# Altium PCB XCKU5P.PcbDoc (part 1 of 4)
Units mil, origin at the board's own origin, x right, y up, seen from the top; angles counter-clockwise.
Board outline 2716.54 x 2559.06 mil, 5 copper layers (Top Layer, SIG1, SIG2, SIG3, Bottom Layer); 206 components, 306 nets, 1544 pads, 186 vias.
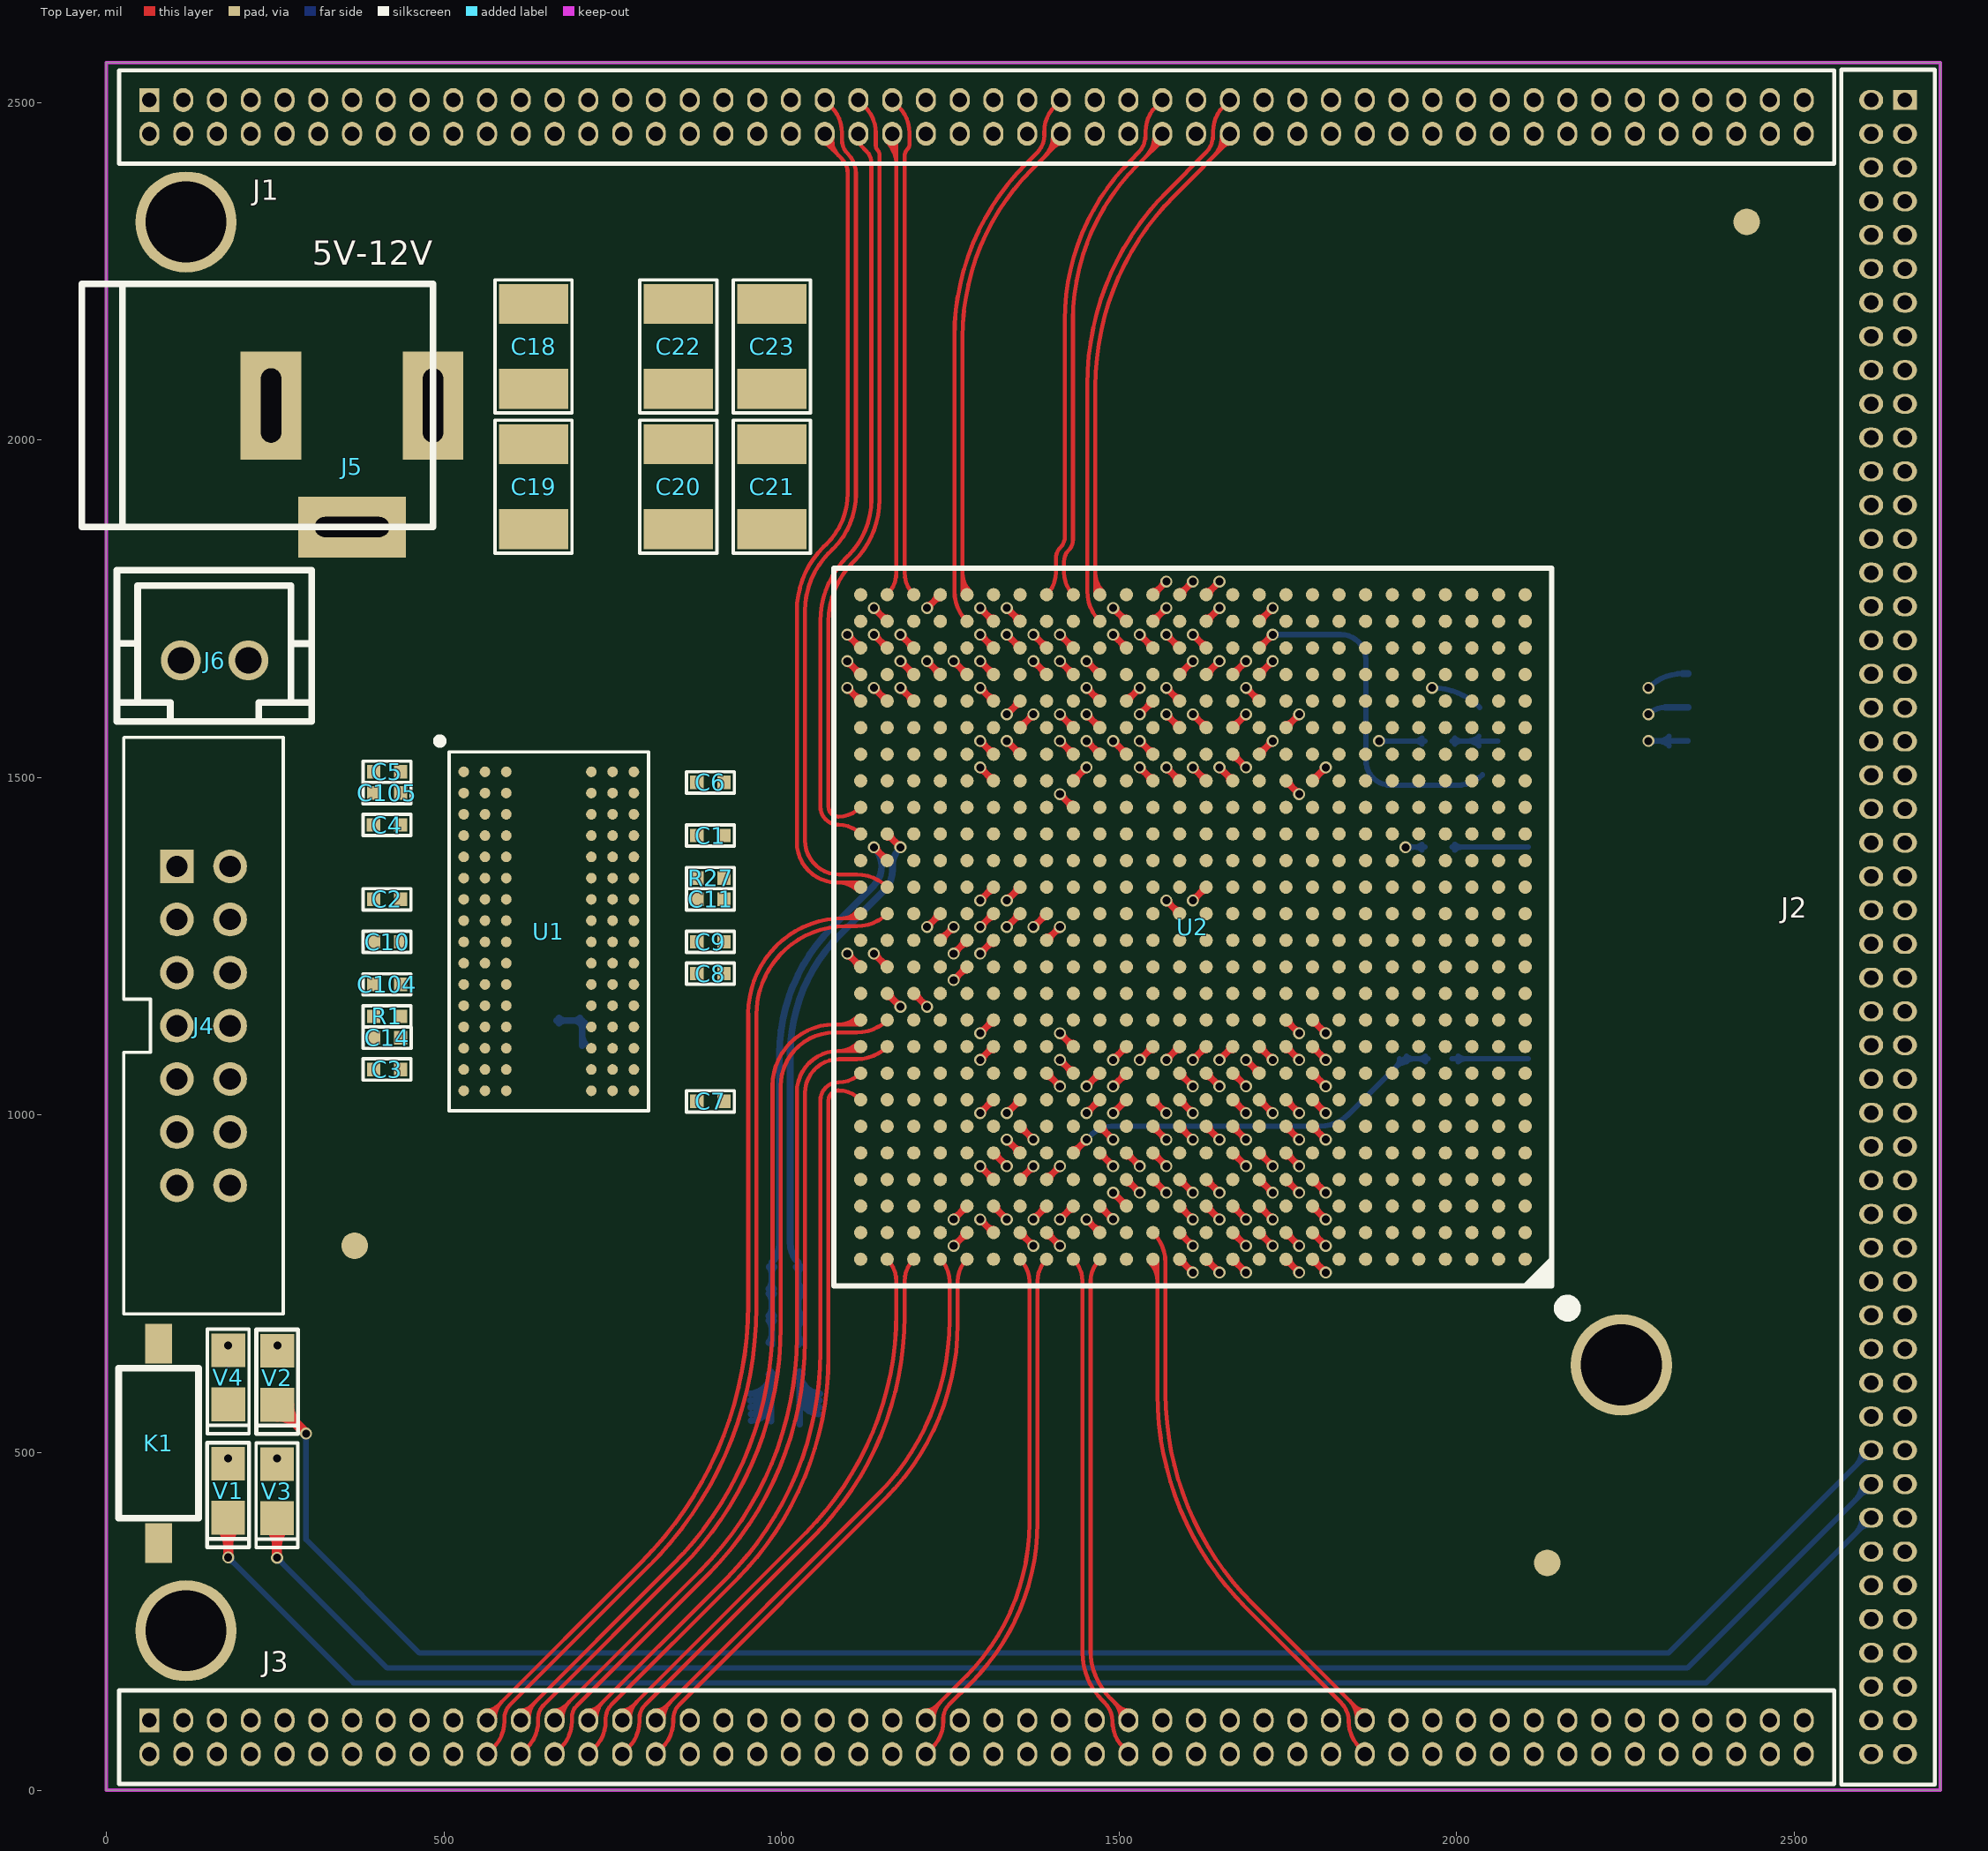
[diagram p0: Top Layer view]
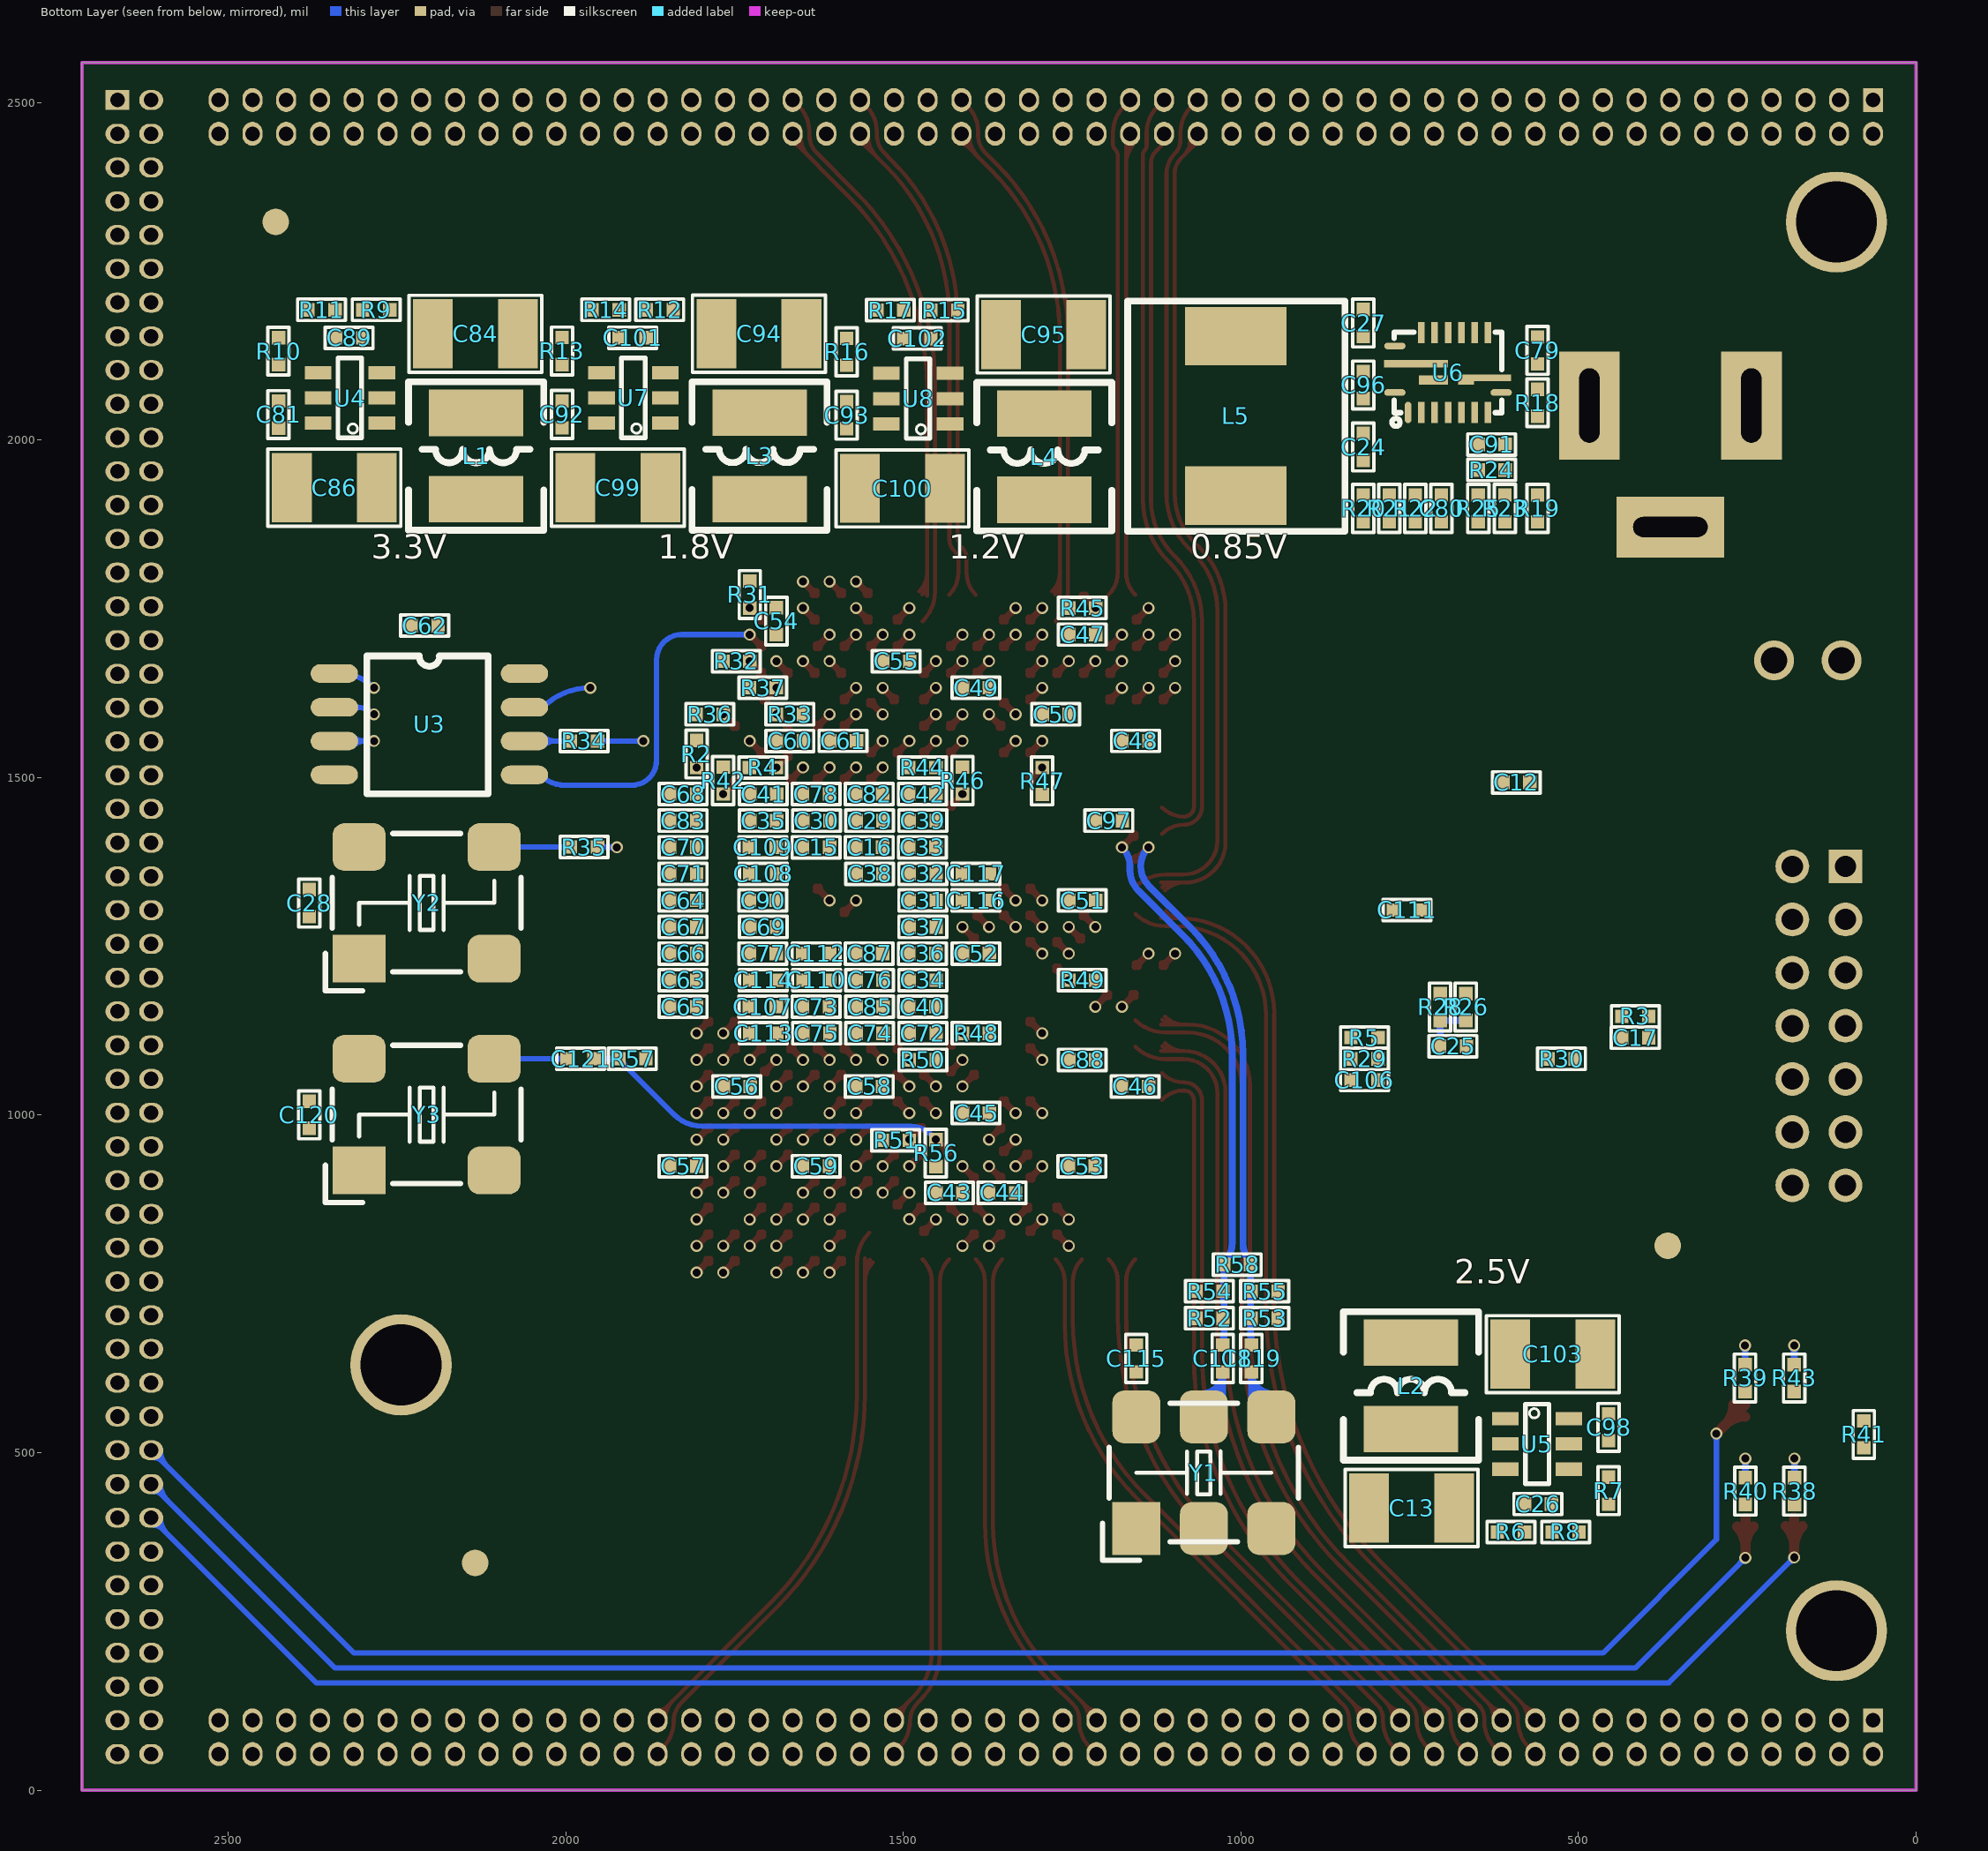
[diagram p1: Bottom Layer view, seen from below]
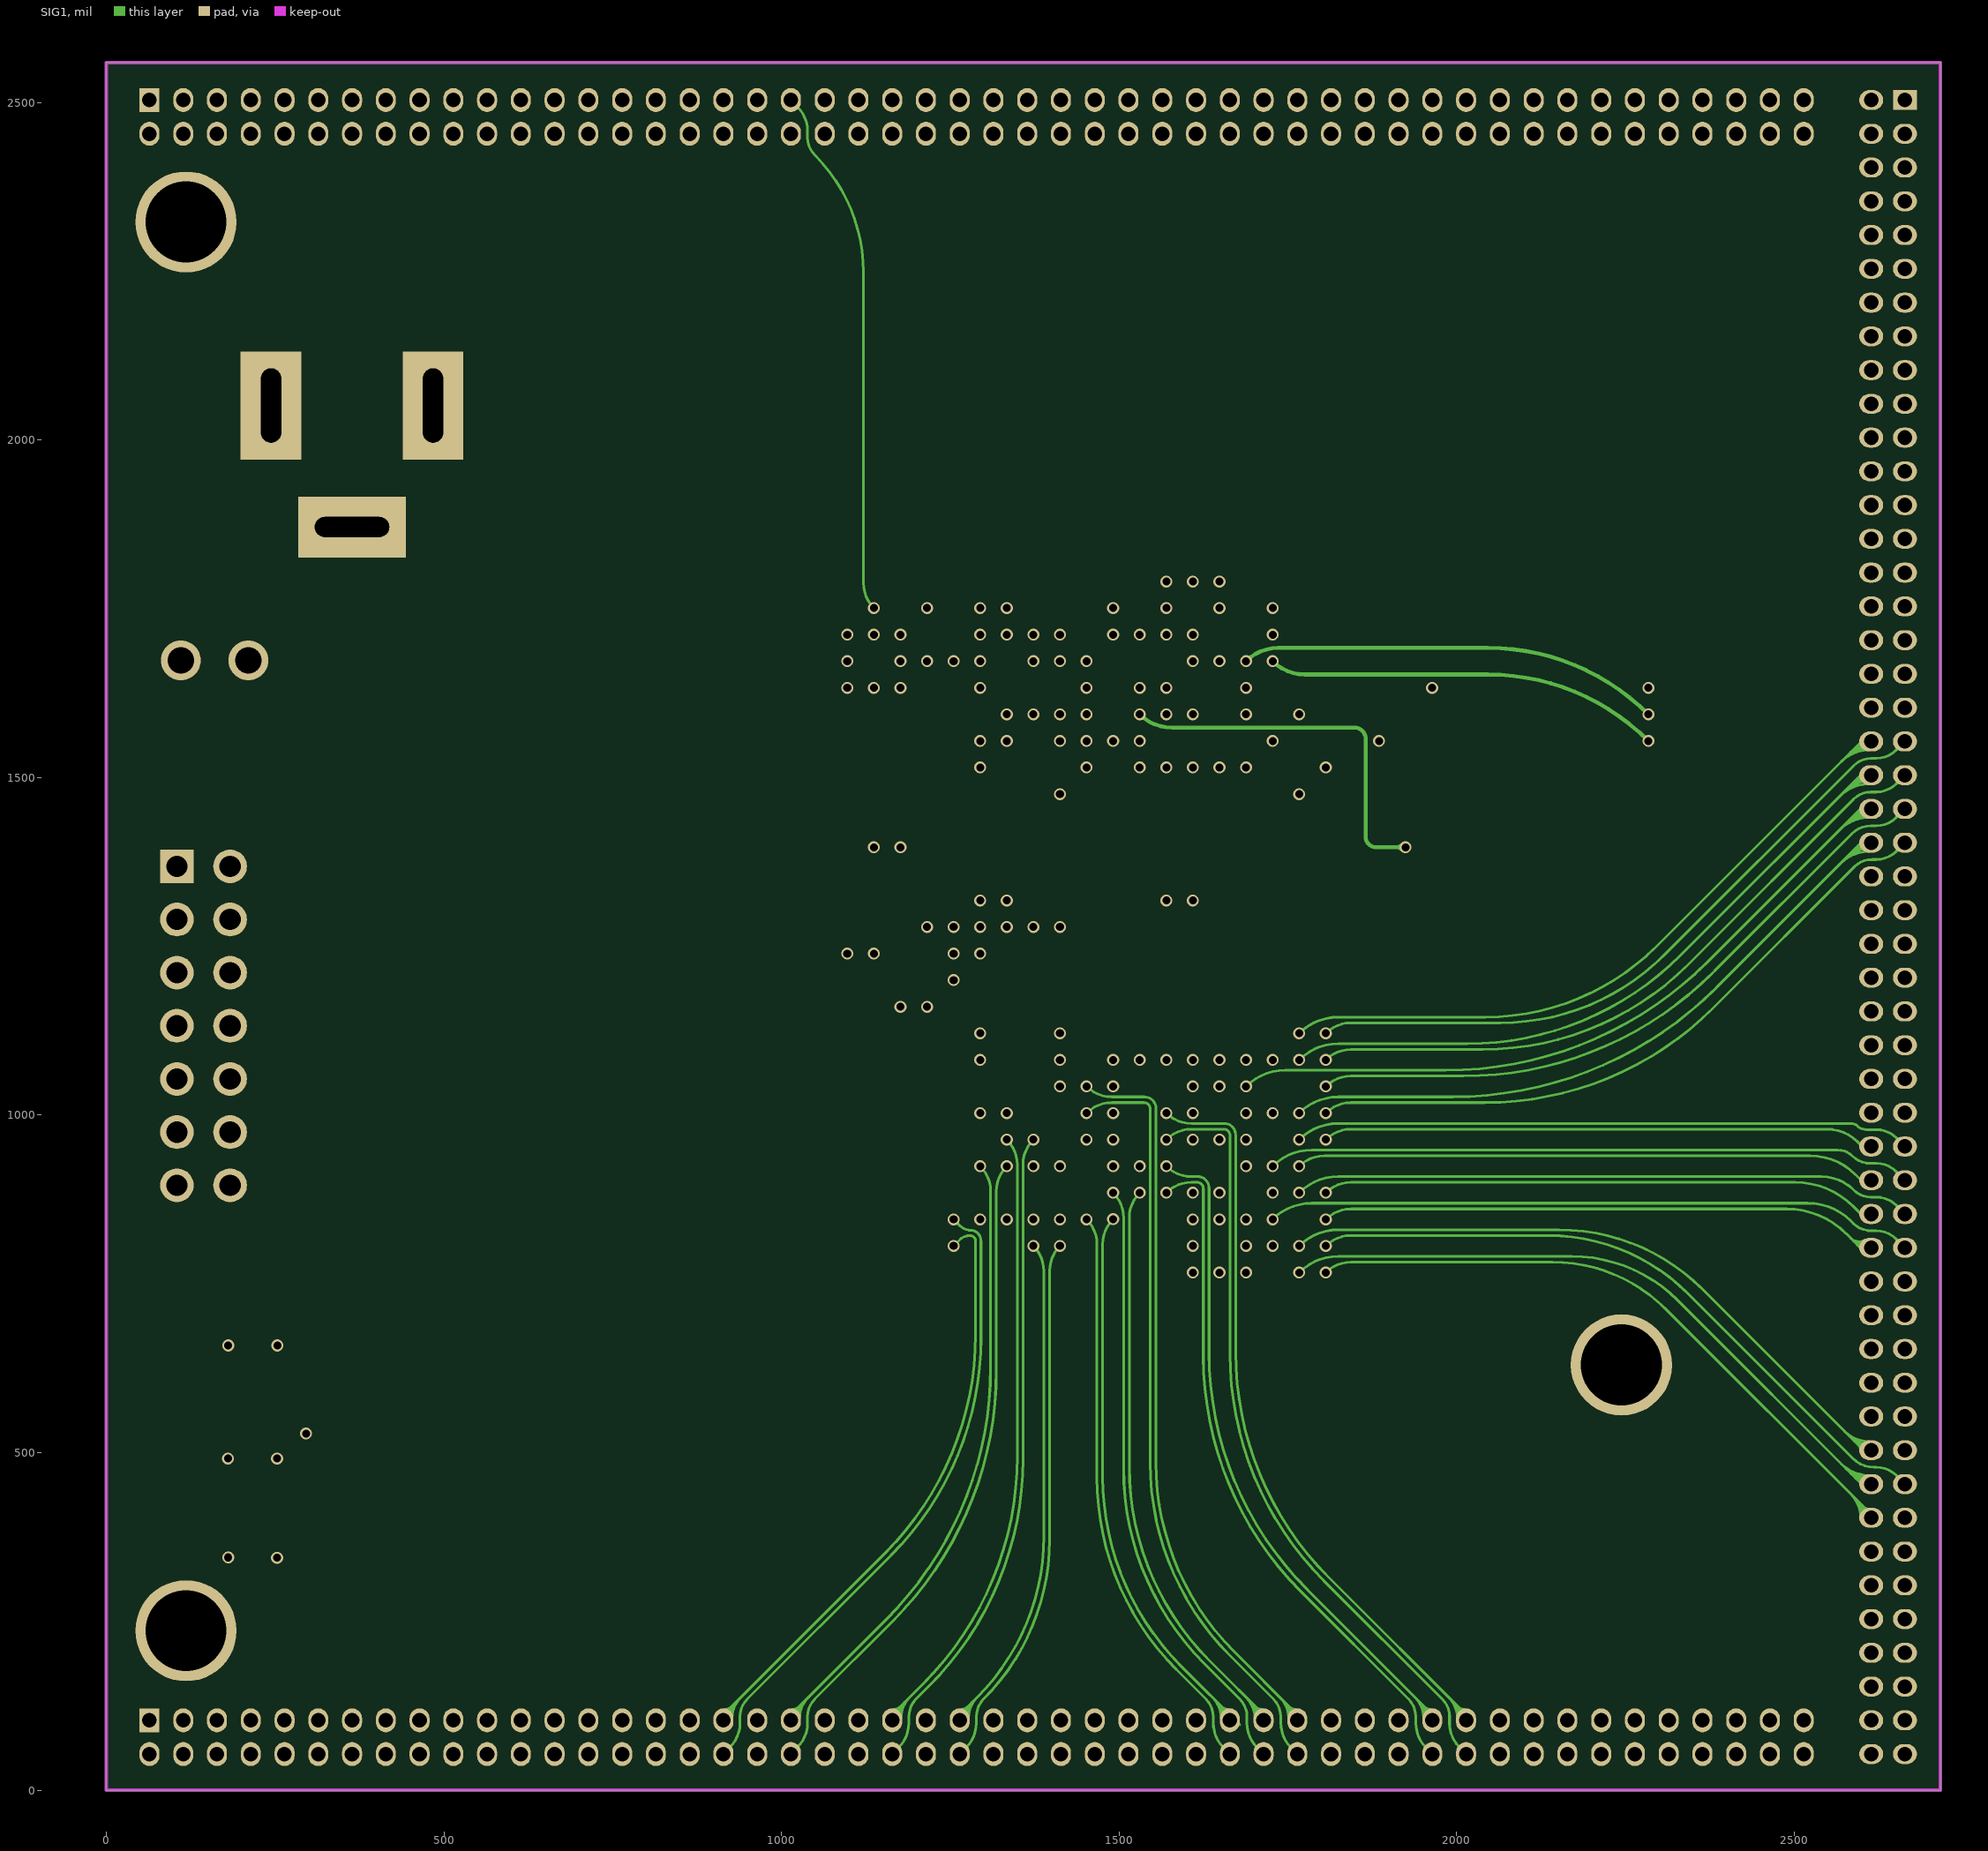
[diagram p2: SIG1]
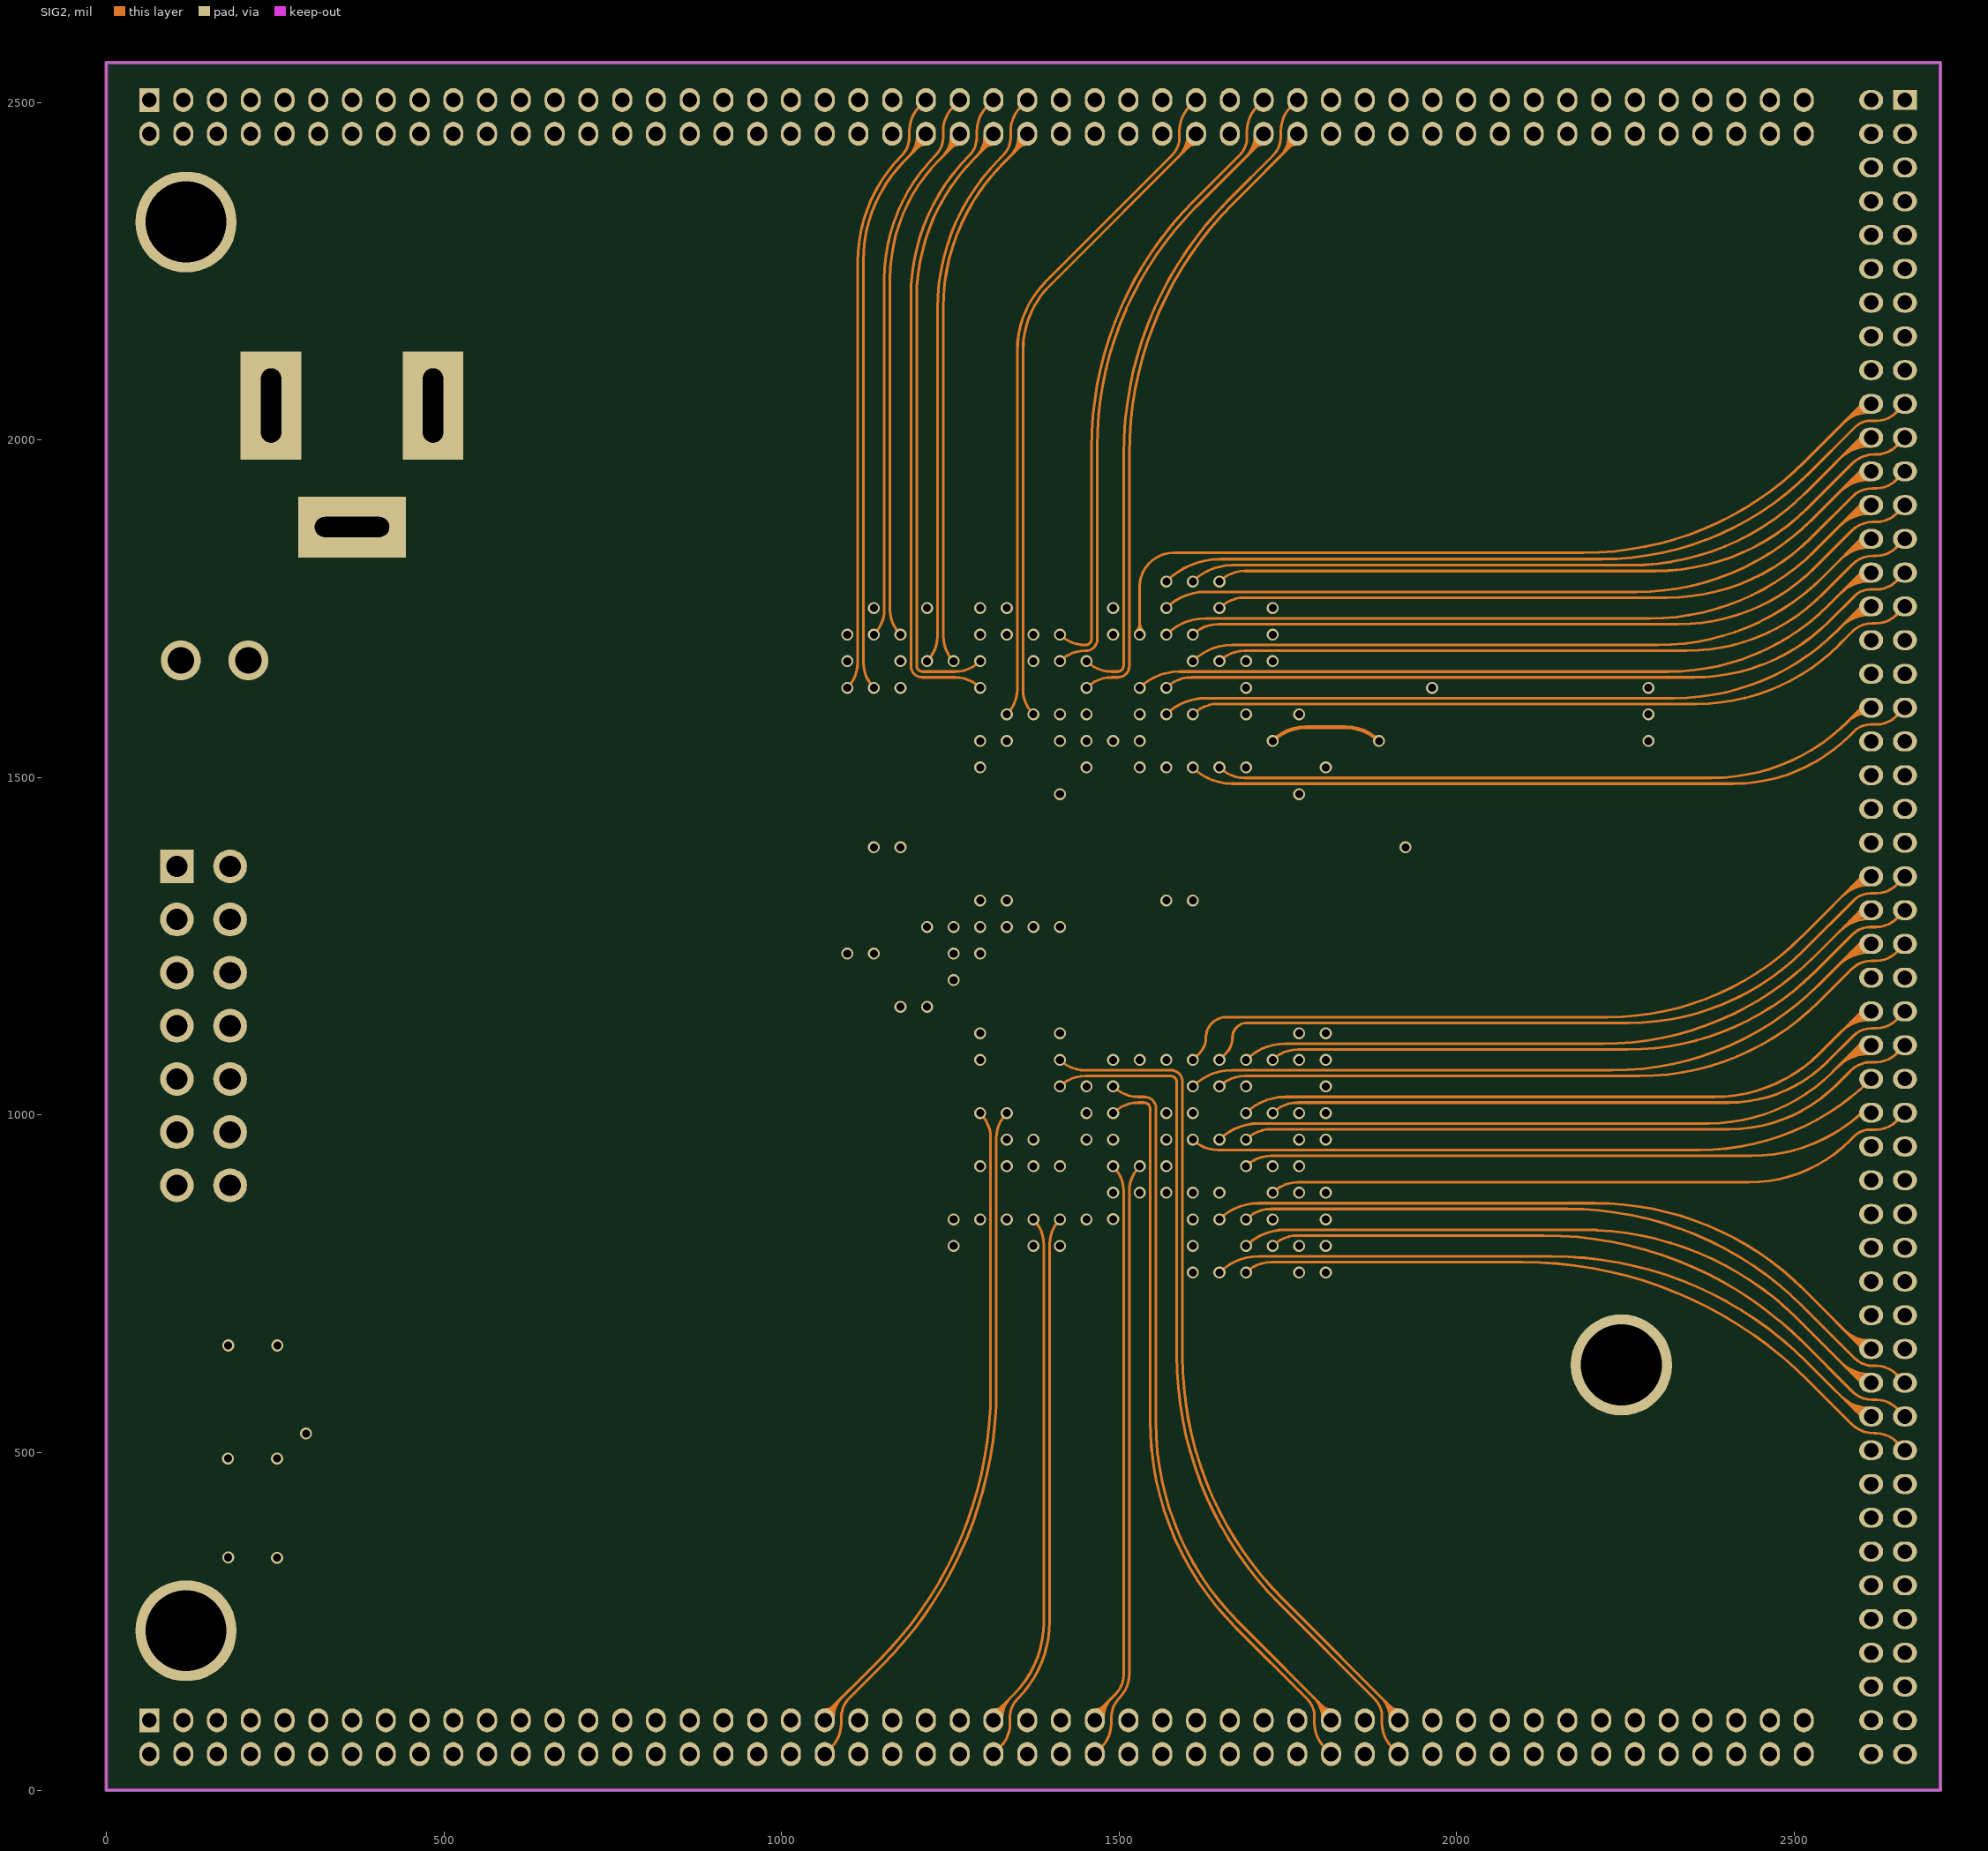
[diagram p3: SIG2]
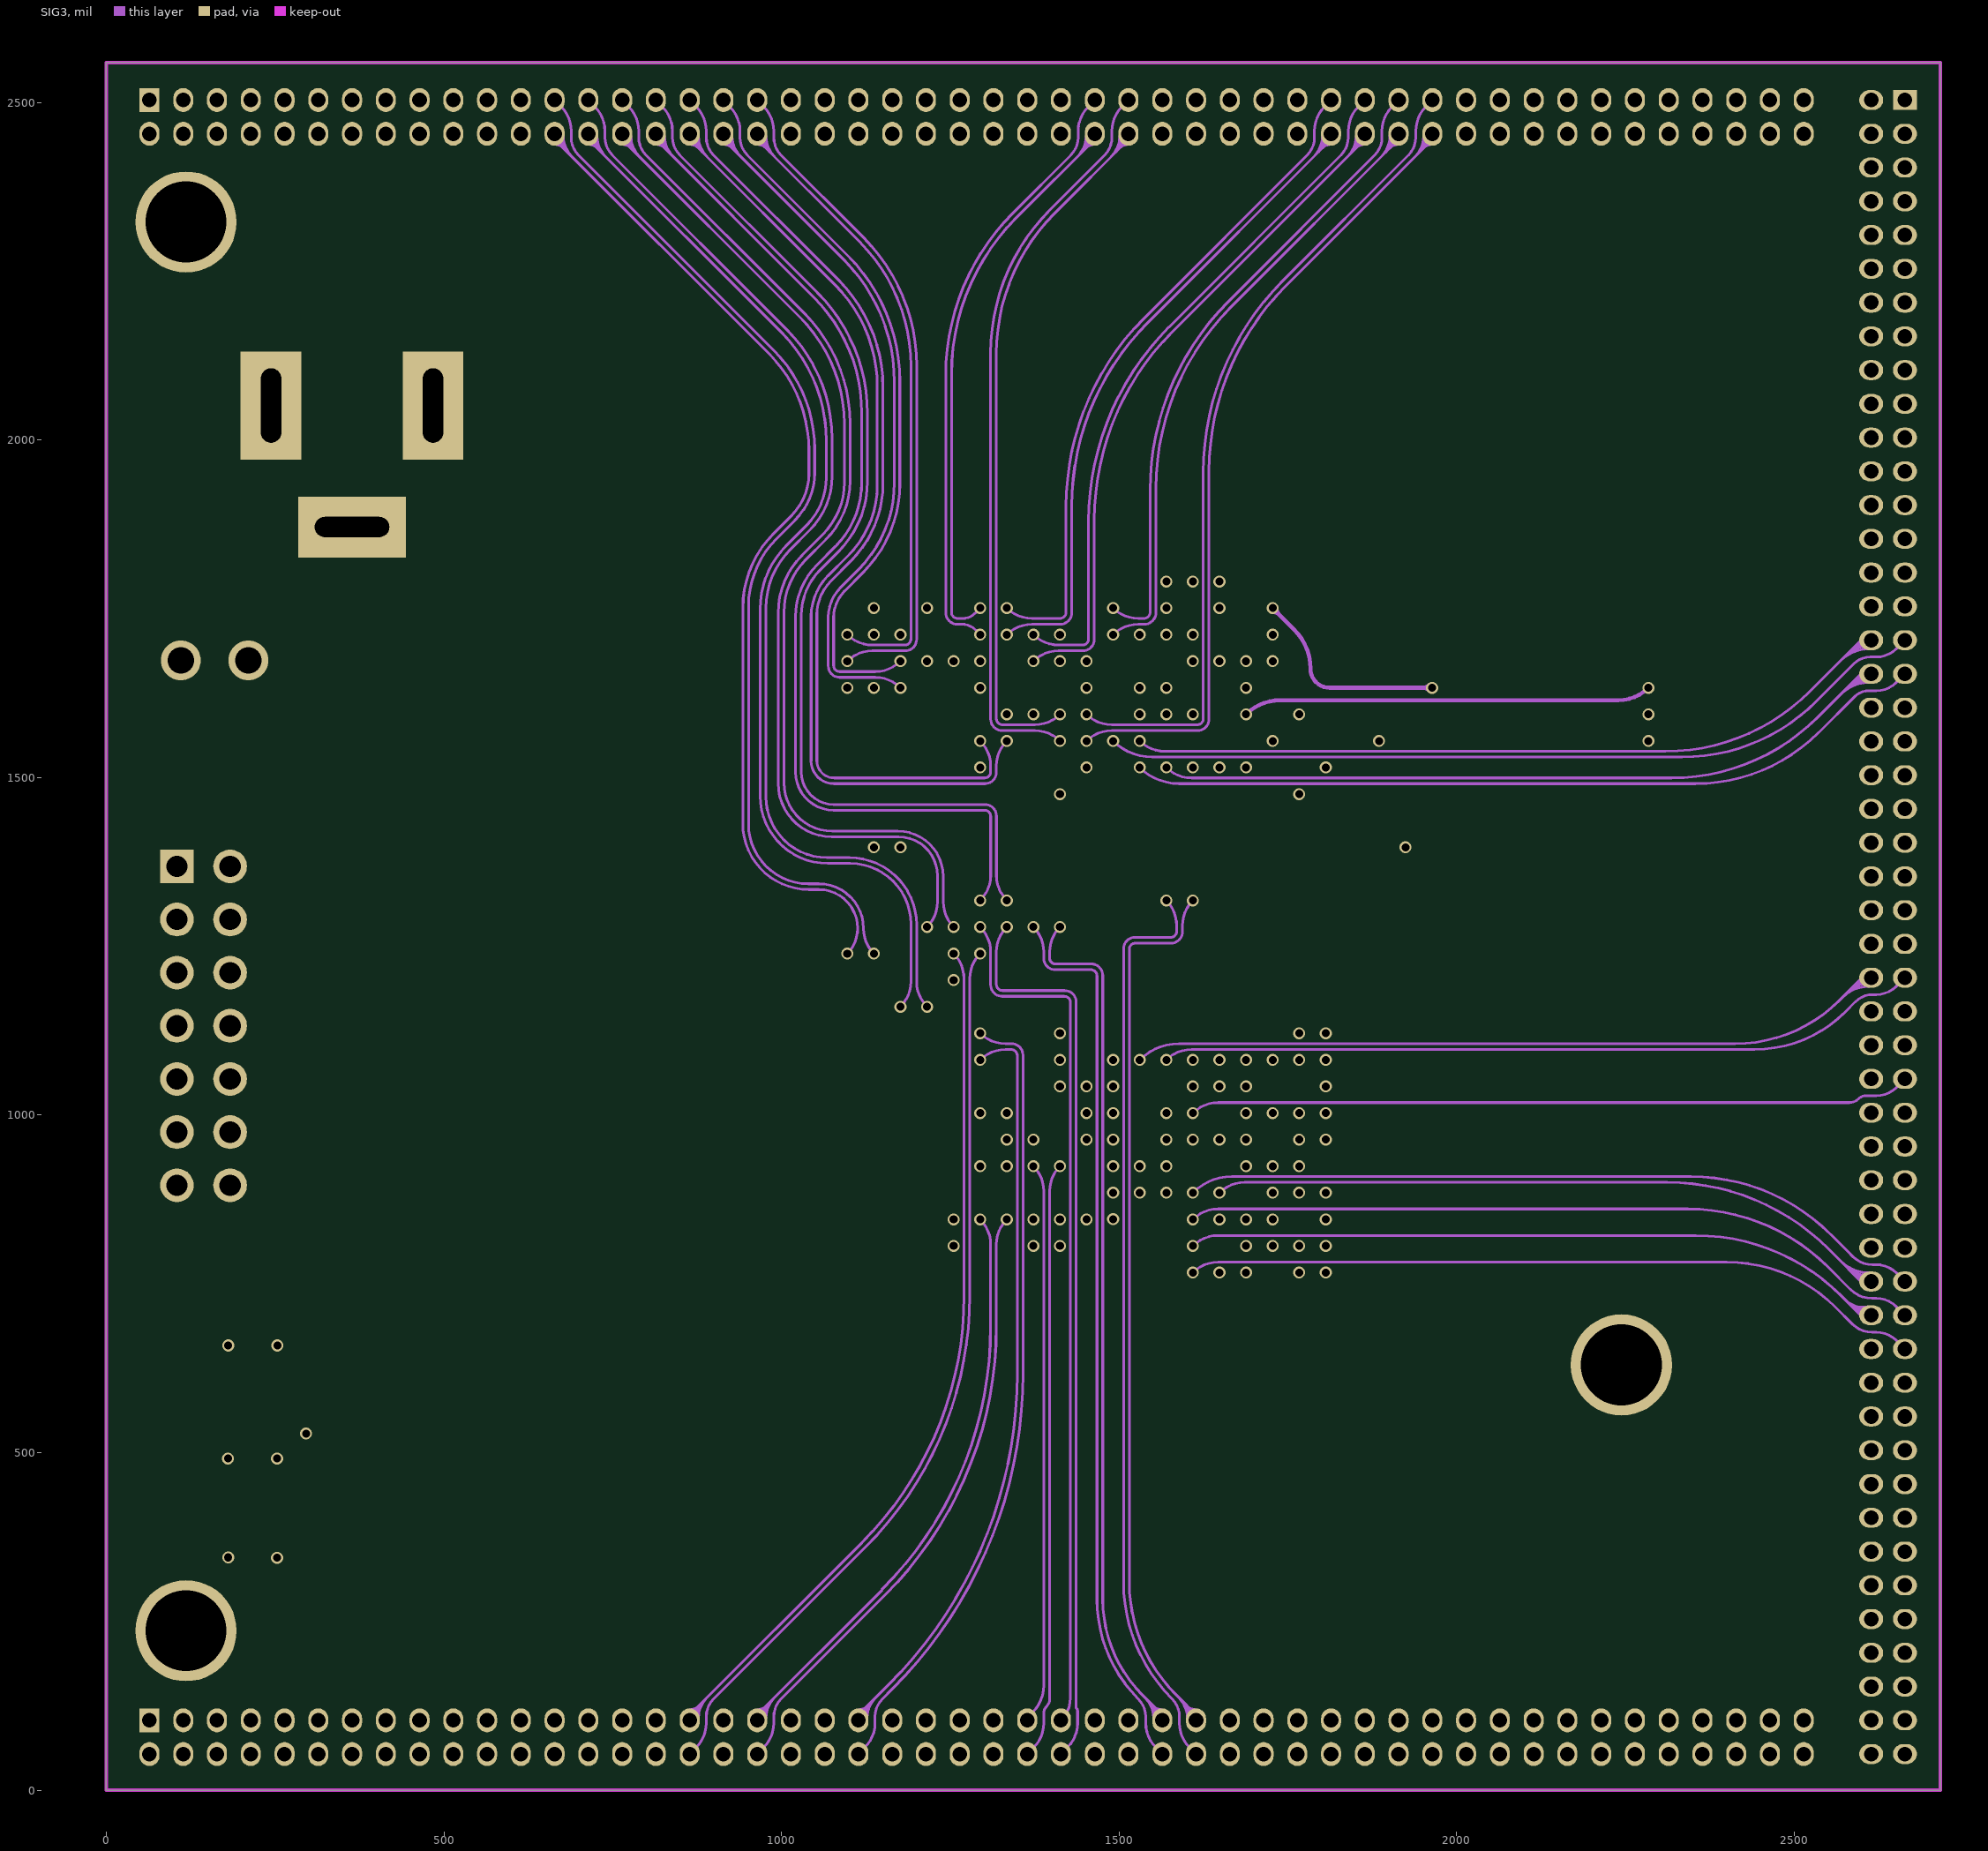
[diagram p4: SIG3]

## Layer stack, top to bottom
Top Layer: signal copper 1.4
Dielectric: core 12.6, FR-4, Dk 4.8
SIG1: signal copper 1.4
Dielectric: prepreg 12.6, FR-4, Dk 4.8
SIG2: signal copper 1.4
Dielectric: core 12.6, FR-4, Dk 4.8
SIG3: signal copper 1.4
Dielectric: prepreg 12.6, FR-4, Dk 4.8
Bottom Layer: signal copper 1.4

## Board outline
0,0 2716.54,0 2716.54,2559.06 0,2559.06

## Design rules (kind name [scope] priority, off if disabled: settings)
Clearance [All] p1: gap=4
DiffPairsRouting [All] p1: maxlimit=10 minlimit=4 mostfreqgap=10 toplayer_maxgap=4 toplayer_prefgap=4 midlayer1_maxgap=4 midlayer1_prefgap=4 midlayer2_maxgap=4 midlayer2_prefgap=4 midlayer3_maxgap=4 midlayer3_prefgap=4 bottomlayer_maxgap=4 bottomlayer_prefgap=4 maxuncoupledlength=500
Height [All] p1: minheight=0 maxheight=10000 prefheight=5000
HoleSize [All] p1: absolutevalues=TRUE maxlimit=1000 minlimit=1 maxpercent=80.000 minpercent=20.000
HoleToHoleClearance [All] p1: gap=0 allowstackedmicrovias=TRUE
MinimumSolderMaskSliver [All] p1: minsoldermaskwidth=0
PlaneClearance PlaneClearance_1 [InNet('VDD12')] p1: clearance=20
PlaneClearance [All] p2: clearance=8
PlaneConnect [All] p1: planeconnectstyle=Direct reliefexpansion=20 reliefentries=4 reliefconductorwidth=10 reliefairgap=10
PolygonConnect [All] p1: connectstyle=Direct reliefconductorwidth=30 reliefentries=4 polygonreliefangle="90 Angle"
RoutingVias [All] p1: holewidth=8 width=16 viastyle="Through Hole" minholewidth=8 minwidth=16 maxholewidth=50 maxwidth=50
SilkToSilkClearance [All] p1: silktosilkclearance=0
SilkscreenOverComponentPads [All] p1: minsilkscreentomaskgap=0
SolderMaskExpansion [All] p1: expansion=2
TestPointUsage [All] p1: valid=0 allowmultiple=FALSE
Testpoint [All] p1: side=15 testpointundercomponent=TRUE minsize=40 maxsize=100 preferedsize=60 minholesize=0 maxholesize=40 preferedholesize=32 testpointgrid=1 style=1021 order=0-112345678
Width [All] p1: maxlimit=60 minlimit=4 preferedwidth=6
15 further rules are at their usual default settings.

## Classes and differential pairs
component class DDR4: C1 C2 C3 C4 C5 C6 C7 C8 C9 C10 C11 C12 C14 C17 C25 C104 C105 C106 C111 R1 R3 R5 R26 R27 R28 R29 R30 U1 U21 V18
component class POWER: C13 C18 C19 C20 C21 C22 C23 C24 C26 C27 C79 C80 C81 C84 C86 C89 C91 C92 C93 C94 C95 C96 C98 C99 C100 C101 C102 C103 D1 F1 J5 J6 J? L1 L2 L3 L4 L5 L? R6 R7 R8 R9 R10 R11 R12 R13 R14 R15 R16 R17 R18 R19 R20 R21 R22 R23 R24 R25 R43 R64 U4 U5 U6 U7 U8 U? V4
component class "FPGA HD BANK": U2
component class "FPGA POWER": C15 C16 C29 C30 C31 C32 C33 C34 C35 C36 C37 C38 C39 C40 C41 C42 C43 C44 C45 C46 C47 C48 C49 C50 C51 C52 C53 C54 C55 C56 C57 C58 C59 C60 C61 C63 C64 C65 C66 C67 C68 C69 C70 C71 C72 C73 C74 C75 C76 C77 C78 C82 C83 C85 C87 C88 C90 C97 C107 C108 C109 C110 C112 C113 C114 C116 C117 C124 C125 C126 C127 C128 C129
component class "FPGA SYSTERM": C28 C62 C115 C118 C119 C120 C121 J1 J2 J3 J4 K1 R2 R4 R31 R32 R33 R34 R35 R36 R37 R38 R39 R40 R41 R42 R52 R53 R54 R55 R56 R57 R58 U3 V1 V2 V3 Y1 Y2 Y3
component class "FPGA HP BANK": R44 R45 R46 R47 R48 R49 R50 R51
differential pair DDR4_DS1: +DDR4_DS1_P -DDR4_DS1_N
differential pair DDR4_DS0: +DDR4_DS0_P -DDR4_DS0_N
differential pair DDR4_CLK: +DDR4_CLK_P -DDR4_CLK_N

## Components (designator, comment, footprint, x,y, rotation, side; value= is the part's Value field where it differs from the comment)
C1 "0.1uF" 0402_c_m 874.84,1414.01 r0 top locked
C2 "0.1uF" 0402_c_m 435.96,1319.52 r180 top locked
C3 "0.1uF" 0402_c_m 435.96,1067.56 r180 top locked
C4 "0.1uF" 0402_c_m 435.92,1429.76 r180 top locked
C5 "0.1uF" 0402_c_m 435.96,1508.5 r180 top locked
C6 "0.1uF" 0402_c_m 874.84,1492.75 r0 top locked
C7 "0.1uF" 0402_c_m 874.84,1020.31 r0 top locked
C8 "0.1uF" 0402_c_m 874.84,1209.54 r0 top locked
C9 "0.1uF" 0402_c_m 874.84,1256.53 r0 top locked
C10 "0.1uF" 0402_c_m 435.96,1256.53 r180 top locked
C11 "0.1uF" 0402_c_m 874.84,1319.52 r0 top locked
C12 "0.1uF" 0402_c_m 612.16,1492.75 r180 bottom locked
C13 "22uF" 1210_C_M 684.2,416.87 r0 bottom locked
C14 "0.1uF" 0402_c_m 396,1114.56 r0 top locked
C15 "0.1uF" 0402_C_M 1609.36,1396.74 r0 bottom locked
C16 "0.1uF" 0402_C_M 1530.62,1396.74 r0 bottom locked
C17 "0.1uF" 0402_c_m 436,1114.56 r180 bottom locked
C18 "22uF" 1210_C_M 633.8,2201.6 r270 top locked
C19 "22uF" 1210_C_M 631.8,1867.79 r90 top locked (schematic designator C79)
C20 "100uF" 1210_C_M 848.25,1993.79 r270 top locked (schematic designator C103)
C21 "100uF" 1210_C_M 986.8,1993.79 r270 top locked (schematic designator C104)
C22 "100uF" 1210_C_M 846.25,2075.6 r90 top locked (schematic designator C105)
C23 "100uF" 1210_C_M 984.8,2075.6 r90 top locked (schematic designator C106)
C24 "0.1uF" 0402_C_M 818.8,1969.71 r90 bottom locked (schematic designator C97)
C25 "0.1uF" 0402_c_m 666,1102 r0 bottom locked
C26 "0.1uF" 0402_C_M 580.19,423.87 r180 bottom locked
C27 "0.1uF" 0402_C_M 818.8,2153.14 r90 bottom locked (schematic designator C98)
C28 "0.1uF" 0402_C_M 2380,1334 r270 bottom locked
C29 "0.1uF" 0402_C_M 1569.99,1436.11 r180 bottom locked
C30 "0.1uF" 0402_C_M 1648.73,1436.11 r180 bottom locked
C31 "0.1uF" 0402_C_M 1451.24,1318 r0 bottom locked
C32 "0.1uF" 0402_C_M 1491.24,1357.37 r180 bottom locked
C33 "0.1uF" 0402_C_M 1451.87,1396.74 r0 bottom locked
C34 "0.1uF" 0402_C_M 1491.24,1199.89 r180 bottom locked
C35 "0.1uF" 0402_C_M 1727.46,1436.12 r180 bottom locked
C36 "0.1uF" 0402_C_M 1451.87,1239.26 r0 bottom locked
C37 "0.1uF" 0402_C_M 1491.24,1278.63 r180 bottom locked
C38 "0.1uF" 0402_C_M 1569.99,1357.37 r180 bottom locked
C39 "0.1uF" 0402_C_M 1491.24,1436.11 r180 bottom locked
C40 "0.1uF" 0402_C_M 1451.87,1160.52 r0 bottom locked
C41 "0.1uF" 0402_C_M 1687.47,1475.48 r0 bottom locked
C42 "0.1uF" 0402_C_M 1451.87,1475.49 r0 bottom locked
C43 "0.1uF" 0402_C_M 1451.87,884.93 r180 bottom locked
C44 "0.1uF" 0402_C_M 1333.76,884.93 r0 bottom locked
C45 "0.1uF" 0402_C_M 1412.5,1003.04 r180 bottom locked
C46 "0.1uF" 0402_C_M 1136.91,1042.41 r0 bottom locked
C47 "0.1uF" 0402_C_M 1255.02,1711.71 r180 bottom locked
C48 "0.1uF" 0402_C_M 1176.28,1554.23 r180 bottom locked
C49 "0.1uF" 0402_C_M 1412.5,1632.97 r180 bottom locked
C50 "0.1uF" 0402_C_M 1294.39,1593.6 r180 bottom locked
C51 "0.1uF" 0402_C_M 1255.02,1318 r180 bottom locked
C52 "0.1uF" 0402_C_M 1412.5,1239.26 r180 bottom locked
C53 "0.1uF" 0402_C_M 1215.65,924.3 r0 bottom locked
C54 "0.1uF" 0402_c_m 1688.1,1711.71 r90 bottom locked
C55 "0.1uF" 0402_C_M 1530.61,1672.34 r180 bottom locked
C56 "0.1uF" 0402_C_M 1766.84,1042.41 r180 bottom locked
C57 "0.1uF" 0402_C_M 1806.21,924.3 r0 bottom locked
C58 "0.1uF" 0402_C_M 1530.61,1042.41 r0 bottom locked
C59 "0.1uF" 0402_C_M 1609.36,924.3 r0 bottom locked
C60 "0.1uF" 0402_C_M 1688.09,1554.22 r180 bottom locked
C61 "0.1uF" 0402_C_M 1609.36,1554.23 r180 bottom locked
C62 "0.1uF" 0402_C_M 2189,1725 r0 bottom locked
C63 "0.1uF" 0402_C_M 1806.21,1199.89 r0 bottom locked
C64 "0.1uF" 0402_C_M 1806.21,1318 r0 bottom locked
C65 "0.1uF" 0402_C_M 1806.21,1160.52 r0 bottom locked
C66 "0.1uF" 0402_C_M 1806.21,1239.26 r0 bottom locked
C67 "0.1uF" 0402_C_M 1806.21,1278.63 r0 bottom locked
C68 "0.1uF" 0402_C_M 1806.21,1475.49 r0 bottom locked
C69 "0.1uF" 0402_C_M 1727.47,1278.63 r180 bottom locked
C70 "0.1uF" 0402_C_M 1806.21,1396.74 r0 bottom locked
C71 "0.1uF" 0402_C_M 1806.21,1357.37 r0 bottom locked
C72 "0.1uF" 0402_C_M 1491.24,1121.15 r180 bottom locked
C73 "0.1uF" 0402_C_M 1609.36,1160.52 r0 bottom locked
C74 "0.1uF" 0402_C_M 1569.99,1121.15 r180 bottom locked
C75 "0.1uF" 0402_C_M 1648.73,1121.15 r180 bottom locked
C76 "0.1uF" 0402_C_M 1569.99,1199.89 r180 bottom locked
C77 "0.1uF" 0402_C_M 1688.1,1239.26 r0 bottom locked
C78 "0.1uF" 0402_C_M 1609.35,1475.49 r0 bottom locked
C79 "0.1uF" 0402_C_M 560.8,2112.6 r90 bottom locked
C80 "0.1uF" 0402_C_M 703.09,1878.6 r90 bottom locked
C81 "0.1uF" 0402_C_M 2425.48,2057.62 r270 bottom locked
C82 "0.1uF" 0402_C_M 1530.61,1475.49 r0 bottom locked
C83 "0.1uF" 0402_C_M 1806.21,1436.11 r0 bottom locked
C84 "22uF" 1210_C_M 2196.8,2158.24 r180 bottom locked
C85 "0.1uF" 0402_C_M 1529.99,1160.52 r0 bottom locked
C86 "100uF" 1210_C_M 2279.8,1928.24 r0 bottom locked
C87 "0.1uF" 0402_C_M 1530.62,1239.26 r0 bottom locked
C88 "0.1uF" 0402_C_M 1255.02,1081.78 r180 bottom locked
C89 "0.1uF" 0402_C_M 2300.81,2151.24 r0 bottom locked
C90 "0.1uF" 0402_C_M 1688.1,1318 r0 bottom locked
C91 "NC" 0402_C_M 648.8,1993.29 r180 bottom locked
C92 "0.1uF" 0402_C_M 2005.58,2057.78 r270 bottom locked
C93 "0.1uF" 0402_C_M 1583.98,2056.63 r270 bottom locked
C94 "22uF" 1210_C_M 1776.9,2158.4 r180 bottom locked
C95 "22uF" 1210_C_M 1355.3,2157.26 r180 bottom locked
C96 "0.1uF" 0402_C_M 818.8,2061.42 r90 bottom locked
C97 "0.1uF" 0402_C_M 1215.65,1436.12 r180 bottom locked
C98 "0.1uF" 0402_C_M 455.52,517.5 r90 bottom locked
C99 "100uF" 1210_C_M 1859.9,1928.4 r0 bottom locked
C100 "100uF" 1210_C_M 1438.3,1927.26 r0 bottom locked
C101 "0.1uF" 0402_C_M 1880.91,2151.4 r0 bottom locked
C102 "0.1uF" 0402_C_M 1459.31,2150.26 r0 bottom locked
C103 "100uF" 1210_C_M 601.2,646.87 r180 bottom locked
C104 "0.1uF" 0402_c_m 435.96,1193.54 r180 top locked
C105 "0.1uF" 0402_c_m 435.96,1477 r180 top locked
C106 "0.1uF" 0402_c_m 797.13,1051.81 r0 bottom locked
C107 "0.1uF" 0402_C_M 1688.1,1160.52 r0 bottom locked
C108 "0.1uF" 0402_C_M 1727.47,1357.37 r180 bottom locked
C109 "0.1uF" 0402_C_M 1688.1,1396.74 r0 bottom locked
C110 "0.1uF" 0402_C_M 1648.73,1199.89 r180 bottom locked
C111 "0.1uF" 0402_c_m 734.14,1303.78 r0 bottom locked
C112 "0.1uF" 0402_C_M 1609.35,1239.26 r0 bottom locked
C113 "0.1uF" 0402_C_M 1727.47,1121.15 r180 bottom locked
C114 "0.1uF" 0402_C_M 1727.47,1199.89 r180 bottom locked
C115 "0.1uF" 0402_C_M 1155,619.5 r90 bottom locked
C116 "0.1uF" 0402_C_M 1412.5,1318 r180 bottom locked
C117 "0.1uF" 0402_C_M 1412.5,1357.37 r180 bottom locked
C118 "0.1uF" 0402_C_M 1026.97,619.5 r90 bottom locked
C119 "0.1uF" 0402_C_M 984.6,619.5 r90 bottom locked
C120 "0.1uF" 0402_C_M 2380,1020.36 r270 bottom locked
C121 "0.1uF" 0402_C_M 1958,1083.36 r0 bottom locked
J1 "DIP100-1.27" CON100_1.27 64.02,2503.5 r270 top locked
J2 "DIP100-1.27" CON100_1.27 2664.02,2503.5 r180 top locked
J3 "DIP100-1.27" CON100_1.27 64.02,103.5 r270 top locked
J4 "DC3-14-2.0" DC3-14-2.0 104.67,1368.44 r0 top locked
J5 "DC5.5_2.1" DC5.5 484.02,2051 r180 top locked
J6 "SIP2" 2.54mm_2p 110.4,1673.5 r0 top locked
K1 "KEY" KEY2 77.54,661.48 r270 top locked
L1 "SWPA5040S3R3MT" CD42 2132.81,1976.22 r270 bottom locked
L2 "SWPA5040S3R3MT" CD42 748.19,598.9 r90 bottom locked
L3 "SWPA5040S3R3MT" CD42 1712.91,1976.38 r270 bottom locked
L4 "SWPA5040S3R3MT" CD42 1291.31,1975.23 r270 bottom locked
L5 "0630CDMCCDS-R22MC" SWPA8050S 1007.8,2035.6 r270 bottom locked
R1 "240" 0402_r_m 435.96,1146.3 r180 top locked
R2 "10k" 0402_R_M 1806.21,1514.86 r90 bottom locked
R3 "240" 0402_r_m 395.96,1146.3 r0 bottom locked
R4 "10k" 0402_R_M 1688.1,1514.85 r0 bottom locked
R5 "240" 0402_R_M 797.13,1114.8 r0 bottom locked
R6 "3.3k" 0402_R_M 580.19,382.36 r0 bottom locked
R7 "22k" 0402_R_M 455.52,423.56 r90 bottom locked
R8 "10k" 0402_R_M 499.19,382.36 r0 bottom locked
R9 "10k" 0402_R_M 2300.81,2192.76 r180 bottom locked (schematic designator R48)
R10 "31.6k" 0402_R_M 2425.48,2151.56 r270 bottom locked
R11 "10k" 0402_R_M 2381.81,2192.76 r180 bottom locked
R12 "10k" 0402_R_M 1880.91,2192.76 r180 bottom locked
R13 "12.4k" 0402_R_M 2005.58,2151.71 r270 bottom locked
R14 "10k" 0402_R_M 1960.91,2192.76 r180 bottom locked
R15 "10k" 0402_R_M 1459.31,2192.26 r180 bottom locked
R16 "5.1k" 0402_R_M 1583.98,2150.57 r270 bottom locked
R17 "10k" 0402_R_M 1539.31,2192.26 r180 bottom locked
R18 "10k" 0402_R_M 560.8,2075.1 r270 bottom locked
R19 "3.3k" 0402_R_M 560.8,1878.6 r90 bottom locked
R20 "0R" 0402_R_M 818.8,1878.6 r90 bottom locked
R21 "10k" 0402_R_M 780.23,1918.6 r270 bottom locked
R22 "31.6k" 0402_R_M 741.66,1918.6 r270 bottom locked
R23 "240" 0402_R_M 609.11,1878.6 r90 bottom locked
R24 "5.1k" 0402_R_M 608.8,1955.6 r0 bottom locked (schematic designator R61)
R25 "12.4k" 0402_R_M 648.49,1918.6 r270 bottom locked
R26 "36" 0402_r_m 667,1140 r90 bottom locked
R27 "240" 0402_R_M 914.84,1351.02 r180 top locked
R28 "36" 0402_r_m 705,1140 r90 bottom locked
R29 "10k" 0402_r_m 797.13,1083.31 r0 bottom locked
R30 "10k" 0402_r_m 545.16,1083.31 r180 bottom locked
R31 "10k" 0402_R_M 1727.47,1751.08 r90 bottom locked
R32 "10k" 0402_R_M 1727.47,1672.34 r0 bottom locked
R33 "10k" 0402_R_M 1648.1,1593.6 r0 bottom locked
R34 "22" 0402_R_M 1993,1554 r180 bottom locked
R35 "22" 0402_R_M 1993,1397 r180 bottom locked
R36 "10k" 0402_R_M 1766.84,1593.6 r0 bottom locked
R37 "10k" 0402_R_M 1688.09,1632.97 r0 bottom locked
R38 "3.3k" 0402_R_M 180.23,463.02 r270 bottom locked
R39 "3.3k" 0402_R_M 253.35,630.52 r270 bottom locked
R40 "3.3k" 0402_R_M 252.94,463.02 r270 bottom locked
R41 "10k" 0402_R_M 77.54,547.04 r270 bottom locked
R42 "10k" 0402_R_M 1766.84,1475.48 r90 bottom locked
R43 "3.3k" 0402_R_M 180.64,630.52 r270 bottom locked
R44 "1k" 0402_R_M 1451.88,1514.86 r0 bottom locked
R45 "240" 0402_R_M 1215.02,1751.07 r0 bottom locked
R46 "1k" 0402_R_M 1412.5,1475.49 r90 bottom locked
R47 "240" 0402_R_M 1294.39,1514.86 r270 bottom locked
R48 "1k" 0402_R_M 1412.5,1121.15 r180 bottom locked
R49 "240" 0402_R_M 1255.02,1199.89 r180 bottom locked
R50 "1k" 0402_R_M 1491.24,1081.78 r180 bottom locked
R51 "240" 0402_R_M 1491.24,962.67 r0 bottom locked
R52 "1k" 0402_R_M 1066.66,699 r180 bottom locked
R53 "1k" 0402_R_M 944.91,699 r0 bottom locked
R54 "1k" 0402_R_M 1026.66,739 r0 bottom locked
R55 "1k" 0402_R_M 984.91,739 r180 bottom locked
R56 "1k" 0402_R_M 1451.88,923.67 r90 bottom locked
R57 "1k" 0402_R_M 1921.31,1083.36 r180 bottom locked
R58 "100" 0402_R_M 1025.6,778.5 r180 bottom locked
U1 "MT40A512M16LY-062E-IT-E" MT40A512M16LY-062E-IT-E 529.42,1508.5 r0 top locked
U2 "XCKU5P-1FFVB676" FFG676 1609.35,1278.63 r180 top locked
U3 "MT25QU128ABA1ESE" SOP8W 2342.8,1654 r180 bottom locked
U4 "JW5033STSOTB#PBF" SOT23-6 2272.32,2024.84 r0 bottom locked
U5 "JW5033STSOTB#PBF" SOT23-6 608.68,550.27 r180 bottom locked
U6 "JWH5087AWQFNAS#TR" QFN3X4-19 693.35,2099.83 r90 bottom locked
U7 "JW5033STSOTB#PBF" SOT23-6 1852.42,2025 r0 bottom locked
U8 "JW5033STSOTB#PBF" SOT23-6 1430.82,2023.85 r0 bottom locked
V1 "LED" 0805D 180.53,483.52 r270 top locked
V2 "LED" 0805D 253.15,651.02 r270 top locked
V3 "LED" 0805D 252.94,483.02 r270 top locked
V4 "LED" 0805D 180.74,651.52 r270 top locked
Y1 "SG7050VAN-100.000000M-KEGA3" "OSC 7050-6P" 1055,470.29 r180 bottom locked
Y2 "NC" "OSC 7050-4P" 2206,1314.32 r180 bottom locked
Y3 "NC" "OSC 7050-4P" 2206,1000.68 r180 bottom locked

## Footprints (in the part's own frame and the unit in brackets; to place one, negate y for a bottom-side part, rotate by r counter-clockwise, add the part's x,y. Pads: shape width x height; smd on the part's side, far side on the other; paste and mask are expansions set on the pad)
2.54mm_2p [mm]
  round 1.5 hole 1: 1(0,0) 2(2.54,0)
  silkscreen extent -2.4,-2.3 4.92,3.4
0402_c_m [mil]
  rect 20x20 smd mask+2: 1(0,0) 2(40,0)
  silkscreen extent -15,-16 55,16, body extent -2,-12 43,12, height 20
0402_C_M [mil]
  rect 20x20 smd mask+2: 1(0,0) 2(40,0)
  silkscreen extent -15,-16 55,16, body extent -2,-12 43,12, height 20
0402_r_m [mil]
  rect 20x20 smd mask+2: 1(0,0) 2(40,0)
  silkscreen extent -15,-16 55,16, body extent -2,-12 43,12, height 14
0402_R_M [mil]
  rect 20x20 smd mask+2: 1(0,0) 2(40,0)
  silkscreen extent -15,-16 55,16, body extent -2,-12 43,12, height 14
0805D [mil]
  rect 50x50 smd mask+2: 1(0,0) 2(80,0)
  silkscreen extent -31,-31 124,31, body extent -7,-25 87,25, height 39
1210_C_M [mm]
  rect 1.5x2.6 smd mask+0.051: 1(0,-0.025) 2(3.2,-0.025)
  silkscreen extent -0.9,-1.48 4.1,1.42, body extent -0.05,-1.34 3.25,1.28, height 2.51
CD42 [mm] "4.5*4*2mm（长宽高）"
  rect 1.75x3.556 smd: 1(-1.625,0) 2(1.625,0)
  silkscreen extent -2.79,-2.54 2.79,2.54, body extent -2.21,-2 2.21,2, height 2.1
CON100_1.27 [mm]
  rect 0.9x0.75 hole 0.55: 1(0,0)
  oval 0.9x0.75 hole 0.55: 2(1.27,0) 3(0,1.27) 4(1.27,1.27) 5(0,2.54) 6(1.27,2.54) 7(0,3.81) 8(1.27,3.81) 9(0,5.08) 10(1.27,5.08) 11(0,6.35) 12(1.27,6.35) 13(0,7.62) 14(1.27,7.62) 15(0,8.89) 16(1.27,8.89) 17(0,10.16) 18(1.27,10.16) 19(0,11.43) 20(1.27,11.43) 21(0,12.7) 22(1.27,12.7) 23(0,13.97) 24(1.27,13.97) 25(0,15.24) 26(1.27,15.24) 27(0,16.51) 28(1.27,16.51) 29(0,17.78) 30(1.27,17.78) 31(0,19.05) 32(1.27,19.05) 33(0,20.32) 34(1.27,20.32) 35(0,21.59) 36(1.27,21.59) 37(0,22.86) 38(1.27,22.86) 39(0,24.13) 40(1.27,24.13) 41(0,25.4) 42(1.27,25.4) 43(0,26.67) 44(1.27,26.67) 45(0,27.94) 46(1.27,27.94) 47(0,29.21) 48(1.27,29.21) 49(0,30.48) 50(1.27,30.48) 51(0,31.75) 52(1.27,31.75) 53(0,33.02) 54(1.27,33.02) 55(0,34.29) 56(1.27,34.29) 57(0,35.56) 58(1.27,35.56) 59(0,36.83) 60(1.27,36.83) 61(0,38.1) 62(1.27,38.1) 63(0,39.37) 64(1.27,39.37) 65(0,40.64) 66(1.27,40.64) 67(0,41.91) 68(1.27,41.91) 69(0,43.18) 70(1.27,43.18) 71(0,44.45) 72(1.27,44.45) 73(0,45.72) 74(1.27,45.72) 75(0,46.99) 76(1.27,46.99) 77(0,48.26) 78(1.27,48.26) 79(0,49.53) 80(1.27,49.53) 81(0,50.8) 82(1.27,50.8) 83(0,52.07) 84(1.27,52.07) 85(0,53.34) 86(1.27,53.34) 87(0,54.61) 88(1.27,54.61) 89(0,55.88) 90(1.27,55.88) 91(0,57.15) 92(1.27,57.15) 93(0,58.42) 94(1.27,58.42) 95(0,59.69) 96(1.27,59.69) 97(0,60.96) 98(1.27,60.96) 99(0,62.23) 100(1.27,62.23)
  silkscreen extent -1.12,-1.14 2.39,63.37
DC3-14-2.0 [mm]
  rect 1.27x1.27 hole 0.8: 1(0,0)
  round 1.27 hole 0.8: 2(0,-2) 3(0,-4) 4(0,-6) 5(0,-8) 6(0,-10) 7(0,-12) 8(2,0) 9(2,-2) 10(2,-4) 11(2,-6) 12(2,-8) 13(2,-10) 14(2,-12)
  silkscreen extent -2,-16.84 4,4.85, body extent -2.13,-16.92 4.17,4.93, height 8
DC5.5 [mil]
  rect 90x160 hole 30 slot 110 at 90 deg: 1(0,0) 2(240,0)
  rect 160x90 hole 30 slot 110 at 0 deg: 2(120,180)
  silkscreen extent 0,-180 520,180, body extent -6,-185 523,188, height 433
FFG676 [mm] "BGA, 676-Balls, Body 27x27mm, Pitch 1.0mm"
  round 0.5 smd: A1(-12.5,12.5) A2(-11.5,12.5) A3(-10.5,12.5) A4(-9.5,12.5) A5(-8.5,12.5) A6(-7.5,12.5) A7(-6.5,12.5) A8(-5.5,12.5) A9(-4.5,12.5) A10(-3.5,12.5) A11(-2.5,12.5) A12(-1.5,12.5) A13(-0.5,12.5) A14(0.5,12.5) A15(1.5,12.5) A16(2.5,12.5) A17(3.5,12.5) A18(4.5,12.5) A19(5.5,12.5) A20(6.5,12.5) A21(7.5,12.5) A22(8.5,12.5) A23(9.5,12.5) A24(10.5,12.5) A25(11.5,12.5) A26(12.5,12.5) AA1(-12.5,-7.5) AA2(-11.5,-7.5) AA3(-10.5,-7.5) AA4(-9.5,-7.5) AA5(-8.5,-7.5) AA6(-7.5,-7.5) AA7(-6.5,-7.5) AA8(-5.5,-7.5) AA9(-4.5,-7.5) AA10(-3.5,-7.5) AA11(-2.5,-7.5) AA12(-1.5,-7.5) AA13(-0.5,-7.5) AA14(0.5,-7.5) AA15(1.5,-7.5) AA16(2.5,-7.5) AA17(3.5,-7.5) AA18(4.5,-7.5) AA19(5.5,-7.5) AA20(6.5,-7.5) AA21(7.5,-7.5) AA22(8.5,-7.5) AA23(9.5,-7.5) AA24(10.5,-7.5) AA25(11.5,-7.5) AA26(12.5,-7.5) AB1(-12.5,-8.5) AB2(-11.5,-8.5) AB3(-10.5,-8.5) AB4(-9.5,-8.5) AB5(-8.5,-8.5) AB6(-7.5,-8.5) AB7(-6.5,-8.5) AB8(-5.5,-8.5) AB9(-4.5,-8.5) AB10(-3.5,-8.5) AB11(-2.5,-8.5) AB12(-1.5,-8.5) AB13(-0.5,-8.5) AB14(0.5,-8.5) AB15(1.5,-8.5) AB16(2.5,-8.5) AB17(3.5,-8.5) AB18(4.5,-8.5) AB19(5.5,-8.5) AB20(6.5,-8.5) AB21(7.5,-8.5) AB22(8.5,-8.5) AB23(9.5,-8.5) AB24(10.5,-8.5) AB25(11.5,-8.5) AB26(12.5,-8.5) AC1(-12.5,-9.5) AC2(-11.5,-9.5) AC3(-10.5,-9.5) AC4(-9.5,-9.5) AC5(-8.5,-9.5) AC6(-7.5,-9.5) AC7(-6.5,-9.5) AC8(-5.5,-9.5) AC9(-4.5,-9.5) AC10(-3.5,-9.5) AC11(-2.5,-9.5) AC12(-1.5,-9.5) AC13(-0.5,-9.5) AC14(0.5,-9.5) AC15(1.5,-9.5) AC16(2.5,-9.5) AC17(3.5,-9.5) AC18(4.5,-9.5) AC19(5.5,-9.5) AC20(6.5,-9.5) AC21(7.5,-9.5) AC22(8.5,-9.5) AC23(9.5,-9.5) AC24(10.5,-9.5) AC25(11.5,-9.5) AC26(12.5,-9.5) AD1(-12.5,-10.5) AD2(-11.5,-10.5) AD3(-10.5,-10.5) AD4(-9.5,-10.5) AD5(-8.5,-10.5) AD6(-7.5,-10.5) AD7(-6.5,-10.5) AD8(-5.5,-10.5) AD9(-4.5,-10.5) AD10(-3.5,-10.5) AD11(-2.5,-10.5) AD12(-1.5,-10.5) AD13(-0.5,-10.5) AD14(0.5,-10.5) AD15(1.5,-10.5) AD16(2.5,-10.5) AD17(3.5,-10.5) AD18(4.5,-10.5) AD19(5.5,-10.5) AD20(6.5,-10.5) AD21(7.5,-10.5) AD22(8.5,-10.5) AD23(9.5,-10.5) AD24(10.5,-10.5) AD25(11.5,-10.5) AD26(12.5,-10.5) AE1(-12.5,-11.5) AE2(-11.5,-11.5) AE3(-10.5,-11.5) AE4(-9.5,-11.5) AE5(-8.5,-11.5) AE6(-7.5,-11.5) AE7(-6.5,-11.5) AE8(-5.5,-11.5) AE9(-4.5,-11.5) AE10(-3.5,-11.5) AE11(-2.5,-11.5) AE12(-1.5,-11.5) AE13(-0.5,-11.5) AE14(0.5,-11.5) AE15(1.5,-11.5) AE16(2.5,-11.5) AE17(3.5,-11.5) AE18(4.5,-11.5) AE19(5.5,-11.5) AE20(6.5,-11.5) AE21(7.5,-11.5) AE22(8.5,-11.5) AE23(9.5,-11.5) AE24(10.5,-11.5) AE25(11.5,-11.5) AE26(12.5,-11.5) AF1(-12.5,-12.5) AF2(-11.5,-12.5) AF3(-10.5,-12.5) AF4(-9.5,-12.5) AF5(-8.5,-12.5) AF6(-7.5,-12.5) AF7(-6.5,-12.5) AF8(-5.5,-12.5) AF9(-4.5,-12.5) AF10(-3.5,-12.5) AF11(-2.5,-12.5) AF12(-1.5,-12.5) AF13(-0.5,-12.5) AF14(0.5,-12.5) AF15(1.5,-12.5) AF16(2.5,-12.5) AF17(3.5,-12.5) AF18(4.5,-12.5) AF19(5.5,-12.5) AF20(6.5,-12.5) AF21(7.5,-12.5) AF22(8.5,-12.5) AF23(9.5,-12.5) AF24(10.5,-12.5) AF25(11.5,-12.5) AF26(12.5,-12.5) B1(-12.5,11.5) B2(-11.5,11.5) B3(-10.5,11.5) B4(-9.5,11.5) B5(-8.5,11.5) B6(-7.5,11.5) B7(-6.5,11.5) B8(-5.5,11.5) B9(-4.5,11.5) B10(-3.5,11.5) B11(-2.5,11.5) B12(-1.5,11.5) B13(-0.5,11.5) B14(0.5,11.5) B15(1.5,11.5) B16(2.5,11.5) B17(3.5,11.5) B18(4.5,11.5) B19(5.5,11.5) B20(6.5,11.5) B21(7.5,11.5) B22(8.5,11.5) B23(9.5,11.5) B24(10.5,11.5) B25(11.5,11.5) B26(12.5,11.5) C1(-12.5,10.5) C2(-11.5,10.5) C3(-10.5,10.5) C4(-9.5,10.5) C5(-8.5,10.5) C6(-7.5,10.5) C7(-6.5,10.5) C8(-5.5,10.5) C9(-4.5,10.5) C10(-3.5,10.5) C11(-2.5,10.5) C12(-1.5,10.5) C13(-0.5,10.5) C14(0.5,10.5) C15(1.5,10.5) C16(2.5,10.5) C17(3.5,10.5) C18(4.5,10.5) C19(5.5,10.5) C20(6.5,10.5) C21(7.5,10.5) C22(8.5,10.5) C23(9.5,10.5) C24(10.5,10.5) C25(11.5,10.5) C26(12.5,10.5) D1(-12.5,9.5) D2(-11.5,9.5) D3(-10.5,9.5) D4(-9.5,9.5) D5(-8.5,9.5) D6(-7.5,9.5) D7(-6.5,9.5) D8(-5.5,9.5) D9(-4.5,9.5) D10(-3.5,9.5) D11(-2.5,9.5) D12(-1.5,9.5) D13(-0.5,9.5) D14(0.5,9.5) D15(1.5,9.5) D16(2.5,9.5) D17(3.5,9.5) D18(4.5,9.5) D19(5.5,9.5) D20(6.5,9.5) D21(7.5,9.5) D22(8.5,9.5) D23(9.5,9.5) D24(10.5,9.5) D25(11.5,9.5) D26(12.5,9.5) E1(-12.5,8.5) E2(-11.5,8.5) E3(-10.5,8.5) E4(-9.5,8.5) E5(-8.5,8.5) E6(-7.5,8.5) E7(-6.5,8.5) E8(-5.5,8.5) E9(-4.5,8.5) E10(-3.5,8.5) E11(-2.5,8.5) E12(-1.5,8.5) E13(-0.5,8.5) E14(0.5,8.5) E15(1.5,8.5) E16(2.5,8.5) E17(3.5,8.5) E18(4.5,8.5) E19(5.5,8.5) E20(6.5,8.5) E21(7.5,8.5) E22(8.5,8.5) E23(9.5,8.5) E24(10.5,8.5) E25(11.5,8.5) E26(12.5,8.5) F1(-12.5,7.5) F2(-11.5,7.5) F3(-10.5,7.5) F4(-9.5,7.5) F5(-8.5,7.5) F6(-7.5,7.5) F7(-6.5,7.5) F8(-5.5,7.5) F9(-4.5,7.5) F10(-3.5,7.5) F11(-2.5,7.5) F12(-1.5,7.5) F13(-0.5,7.5) F14(0.5,7.5) F15(1.5,7.5) F16(2.5,7.5) F17(3.5,7.5) F18(4.5,7.5) F19(5.5,7.5) F20(6.5,7.5) F21(7.5,7.5) F22(8.5,7.5) F23(9.5,7.5) F24(10.5,7.5) F25(11.5,7.5) F26(12.5,7.5) G1(-12.5,6.5) G2(-11.5,6.5) G3(-10.5,6.5) G4(-9.5,6.5) G5(-8.5,6.5) G6(-7.5,6.5) G7(-6.5,6.5) G8(-5.5,6.5) G9(-4.5,6.5) G10(-3.5,6.5) G11(-2.5,6.5) G12(-1.5,6.5) G13(-0.5,6.5) G14(0.5,6.5) G15(1.5,6.5) G16(2.5,6.5) G17(3.5,6.5) G18(4.5,6.5) G19(5.5,6.5) G20(6.5,6.5) G21(7.5,6.5) G22(8.5,6.5) G23(9.5,6.5) G24(10.5,6.5) G25(11.5,6.5) G26(12.5,6.5) H1(-12.5,5.5) H2(-11.5,5.5) H3(-10.5,5.5) H4(-9.5,5.5) H5(-8.5,5.5) H6(-7.5,5.5) H7(-6.5,5.5) H8(-5.5,5.5) H9(-4.5,5.5) H10(-3.5,5.5) H11(-2.5,5.5) H12(-1.5,5.5) H13(-0.5,5.5) H14(0.5,5.5) H15(1.5,5.5) H16(2.5,5.5) H17(3.5,5.5) H18(4.5,5.5) H19(5.5,5.5) H20(6.5,5.5) H21(7.5,5.5) H22(8.5,5.5) H23(9.5,5.5) H24(10.5,5.5) H25(11.5,5.5) H26(12.5,5.5) J1(-12.5,4.5) J2(-11.5,4.5) J3(-10.5,4.5) J4(-9.5,4.5) J5(-8.5,4.5) J6(-7.5,4.5) J7(-6.5,4.5) J8(-5.5,4.5) J9(-4.5,4.5) J10(-3.5,4.5) J11(-2.5,4.5) J12(-1.5,4.5) J13(-0.5,4.5) J14(0.5,4.5) J15(1.5,4.5) J16(2.5,4.5) J17(3.5,4.5) J18(4.5,4.5) J19(5.5,4.5) J20(6.5,4.5) J21(7.5,4.5) J22(8.5,4.5) J23(9.5,4.5) J24(10.5,4.5) J25(11.5,4.5) J26(12.5,4.5) K1(-12.5,3.5) K2(-11.5,3.5) K3(-10.5,3.5) K4(-9.5,3.5) K5(-8.5,3.5) K6(-7.5,3.5) K7(-6.5,3.5) K8(-5.5,3.5) K9(-4.5,3.5) K10(-3.5,3.5) K11(-2.5,3.5) K12(-1.5,3.5) K13(-0.5,3.5) K14(0.5,3.5) K15(1.5,3.5) K16(2.5,3.5) K17(3.5,3.5) K18(4.5,3.5) K19(5.5,3.5) K20(6.5,3.5) K21(7.5,3.5) K22(8.5,3.5) K23(9.5,3.5) K24(10.5,3.5) K25(11.5,3.5) K26(12.5,3.5) L1(-12.5,2.5) L2(-11.5,2.5) L3(-10.5,2.5) L4(-9.5,2.5) L5(-8.5,2.5) L6(-7.5,2.5) L7(-6.5,2.5) L8(-5.5,2.5) L9(-4.5,2.5) L10(-3.5,2.5) L11(-2.5,2.5) L12(-1.5,2.5) L13(-0.5,2.5) L14(0.5,2.5) L15(1.5,2.5) L16(2.5,2.5) L17(3.5,2.5) L18(4.5,2.5) L19(5.5,2.5) L20(6.5,2.5) L21(7.5,2.5) L22(8.5,2.5) L23(9.5,2.5) L24(10.5,2.5) L25(11.5,2.5) L26(12.5,2.5) M1(-12.5,1.5) M2(-11.5,1.5) M3(-10.5,1.5) M4(-9.5,1.5) M5(-8.5,1.5) M6(-7.5,1.5) M7(-6.5,1.5) M8(-5.5,1.5) M9(-4.5,1.5) M10(-3.5,1.5) M11(-2.5,1.5) M12(-1.5,1.5) M13(-0.5,1.5) M14(0.5,1.5) M15(1.5,1.5) M16(2.5,1.5) M17(3.5,1.5) M18(4.5,1.5) M19(5.5,1.5) M20(6.5,1.5) M21(7.5,1.5) M22(8.5,1.5) M23(9.5,1.5) M24(10.5,1.5) M25(11.5,1.5) M26(12.5,1.5) N1(-12.5,0.5) N2(-11.5,0.5) N3(-10.5,0.5) N4(-9.5,0.5) N5(-8.5,0.5) N6(-7.5,0.5) N7(-6.5,0.5) N8(-5.5,0.5) N9(-4.5,0.5) N10(-3.5,0.5) N11(-2.5,0.5) N12(-1.5,0.5) N13(-0.5,0.5) N14(0.5,0.5) N15(1.5,0.5) N16(2.5,0.5) N17(3.5,0.5) N18(4.5,0.5) N19(5.5,0.5) N20(6.5,0.5) N21(7.5,0.5) N22(8.5,0.5) N23(9.5,0.5) N24(10.5,0.5) N25(11.5,0.5) N26(12.5,0.5) P1(-12.5,-0.5) P2(-11.5,-0.5) P3(-10.5,-0.5) P4(-9.5,-0.5) P5(-8.5,-0.5) P6(-7.5,-0.5) P7(-6.5,-0.5) P8(-5.5,-0.5) P9(-4.5,-0.5) P10(-3.5,-0.5) P11(-2.5,-0.5) P12(-1.5,-0.5) P13(-0.5,-0.5) P14(0.5,-0.5) P15(1.5,-0.5) P16(2.5,-0.5) P17(3.5,-0.5) P18(4.5,-0.5) P19(5.5,-0.5) P20(6.5,-0.5) P21(7.5,-0.5) P22(8.5,-0.5) P23(9.5,-0.5) P24(10.5,-0.5) P25(11.5,-0.5) P26(12.5,-0.5) R1(-12.5,-1.5) R2(-11.5,-1.5) R3(-10.5,-1.5) R4(-9.5,-1.5) R5(-8.5,-1.5) R6(-7.5,-1.5) R7(-6.5,-1.5) R8(-5.5,-1.5) R9(-4.5,-1.5) R10(-3.5,-1.5) R11(-2.5,-1.5) R12(-1.5,-1.5) R13(-0.5,-1.5) R14(0.5,-1.5) R15(1.5,-1.5) R16(2.5,-1.5) R17(3.5,-1.5) R18(4.5,-1.5) R19(5.5,-1.5) R20(6.5,-1.5) R21(7.5,-1.5) R22(8.5,-1.5) R23(9.5,-1.5) R24(10.5,-1.5) R25(11.5,-1.5) R26(12.5,-1.5) T1(-12.5,-2.5) T2(-11.5,-2.5) T3(-10.5,-2.5) T4(-9.5,-2.5) T5(-8.5,-2.5) T6(-7.5,-2.5) T7(-6.5,-2.5) T8(-5.5,-2.5) T9(-4.5,-2.5) T10(-3.5,-2.5) T11(-2.5,-2.5) T12(-1.5,-2.5) T13(-0.5,-2.5) T14(0.5,-2.5) T15(1.5,-2.5) T16(2.5,-2.5) T17(3.5,-2.5) T18(4.5,-2.5) T19(5.5,-2.5) T20(6.5,-2.5) T21(7.5,-2.5) T22(8.5,-2.5) T23(9.5,-2.5) T24(10.5,-2.5) T25(11.5,-2.5) T26(12.5,-2.5) U1(-12.5,-3.5) U2(-11.5,-3.5) U3(-10.5,-3.5) U4(-9.5,-3.5) U5(-8.5,-3.5) U6(-7.5,-3.5) U7(-6.5,-3.5) U8(-5.5,-3.5) U9(-4.5,-3.5) U10(-3.5,-3.5) U11(-2.5,-3.5) U12(-1.5,-3.5) U13(-0.5,-3.5) U14(0.5,-3.5) U15(1.5,-3.5) U16(2.5,-3.5) U17(3.5,-3.5) U18(4.5,-3.5) U19(5.5,-3.5) U20(6.5,-3.5) U21(7.5,-3.5) U22(8.5,-3.5) U23(9.5,-3.5) U24(10.5,-3.5) U25(11.5,-3.5) U26(12.5,-3.5) V1(-12.5,-4.5) V2(-11.5,-4.5) V3(-10.5,-4.5) V4(-9.5,-4.5) V5(-8.5,-4.5) V6(-7.5,-4.5) V7(-6.5,-4.5) V8(-5.5,-4.5) V9(-4.5,-4.5) V10(-3.5,-4.5) V11(-2.5,-4.5) V12(-1.5,-4.5) V13(-0.5,-4.5) V14(0.5,-4.5) V15(1.5,-4.5) V16(2.5,-4.5) V17(3.5,-4.5) V18(4.5,-4.5) V19(5.5,-4.5) V20(6.5,-4.5) V21(7.5,-4.5) V22(8.5,-4.5) V23(9.5,-4.5) V24(10.5,-4.5) V25(11.5,-4.5) V26(12.5,-4.5) W1(-12.5,-5.5) W2(-11.5,-5.5) W3(-10.5,-5.5) W4(-9.5,-5.5) W5(-8.5,-5.5) W6(-7.5,-5.5) W7(-6.5,-5.5) W8(-5.5,-5.5) W9(-4.5,-5.5) W10(-3.5,-5.5) W11(-2.5,-5.5) W12(-1.5,-5.5) W13(-0.5,-5.5) W14(0.5,-5.5) W15(1.5,-5.5) W16(2.5,-5.5) W17(3.5,-5.5) W18(4.5,-5.5) W19(5.5,-5.5) W20(6.5,-5.5) W21(7.5,-5.5) W22(8.5,-5.5) W23(9.5,-5.5) W24(10.5,-5.5) W25(11.5,-5.5) W26(12.5,-5.5) Y1(-12.5,-6.5) Y2(-11.5,-6.5) Y3(-10.5,-6.5) Y4(-9.5,-6.5) Y5(-8.5,-6.5) Y6(-7.5,-6.5) Y7(-6.5,-6.5) Y8(-5.5,-6.5) Y9(-4.5,-6.5) Y10(-3.5,-6.5) Y11(-2.5,-6.5) Y12(-1.5,-6.5) Y13(-0.5,-6.5) Y14(0.5,-6.5) Y15(1.5,-6.5) Y16(2.5,-6.5) Y17(3.5,-6.5) Y18(4.5,-6.5) Y19(5.5,-6.5) Y20(6.5,-6.5) Y21(7.5,-6.5) Y22(8.5,-6.5) Y23(9.5,-6.5) Y24(10.5,-6.5) Y25(11.5,-6.5) Y26(12.5,-6.5)
  silkscreen extent -14.34,-13.5 13.5,14.6, body extent -13.5,-13.5 13.5,13.5, height 3.37
KEY2 [mm]
  rect 1.5x1 smd mask+0.051: 1(0,0) 2(7.5,0)
  silkscreen extent 0.92,-1.5 6.57,1.5, body extent 0.92,-1.51 6.59,1.55, height 2.55
MT40A512M16LY-062E-IT-E [mm]
  round 0.4 smd: A1(0,0) A2(0.8,0) A3(1.6,0) A7(4.8,0) A8(5.6,0) A9(6.4,0) B1(0,-0.8) B2(0.8,-0.8) B3(1.6,-0.8) B7(4.8,-0.8) B8(5.6,-0.8) B9(6.4,-0.8) C1(0,-1.6) C2(0.8,-1.6) C3(1.6,-1.6) C7(4.8,-1.6) C8(5.6,-1.6) C9(6.4,-1.6) D1(0,-2.4) D2(0.8,-2.4) D3(1.6,-2.4) D7(4.8,-2.4) D8(5.6,-2.4) D9(6.4,-2.4) E1(0,-3.2) E2(0.8,-3.2) E3(1.6,-3.2) E7(4.8,-3.2) E8(5.6,-3.2) E9(6.4,-3.2) F1(0,-4) F2(0.8,-4) F3(1.6,-4) F7(4.8,-4) F8(5.6,-4) F9(6.4,-4) G1(0,-4.8) G2(0.8,-4.8) G3(1.6,-4.8) G7(4.8,-4.8) G8(5.6,-4.8) G9(6.4,-4.8) H1(0,-5.6) H2(0.8,-5.6) H3(1.6,-5.6) H7(4.8,-5.6) H8(5.6,-5.6) H9(6.4,-5.6) J1(0,-6.4) J2(0.8,-6.4) J3(1.6,-6.4) J7(4.8,-6.4) J8(5.6,-6.4) J9(6.4,-6.4) K1(0,-7.2) K2(0.8,-7.2) K3(1.6,-7.2) K7(4.8,-7.2) K8(5.6,-7.2) K9(6.4,-7.2) L1(0,-8) L2(0.8,-8) L3(1.6,-8) L7(4.8,-8) L8(5.6,-8) L9(6.4,-8) M1(0,-8.8) M2(0.8,-8.8) M3(1.6,-8.8) M7(4.8,-8.8) M8(5.6,-8.8) M9(6.4,-8.8) N1(0,-9.6) N2(0.8,-9.6) N3(1.6,-9.6) N7(4.8,-9.6) N8(5.6,-9.6) N9(6.4,-9.6) P1(0,-10.4) P2(0.8,-10.4) P3(1.6,-10.4) P7(4.8,-10.4) P8(5.6,-10.4) P9(6.4,-10.4) R1(0,-11.2) R2(0.8,-11.2) R3(1.6,-11.2) R7(4.8,-11.2) R8(5.6,-11.2) R9(6.4,-11.2) T1(0,-12) T2(0.8,-12) T3(1.6,-12) T7(4.8,-12) T8(5.6,-12) T9(6.4,-12)
  silkscreen extent -1.03,-12.75 6.95,1.28, body extent -0.53,-12.75 6.96,0.76, height 1.2
"OSC 7050-4P" [mm] "7mm*5mm*1.3mm(长*宽*高)"
  rect 2x1.8 smd: 1(-2.54,-2.1)
  rrect50% 2x1.8 smd: 2(2.54,-2.1) 3(2.54,2.1) 4(-2.54,2.1)
  silkscreen extent -3.81,-3.3 3.56,2.61, body extent -3.5,-2.5 3.5,2.5, height 1.36
"OSC 7050-6P" [mm] "7mm*5mm*1.3mm(长*宽*高)"
  rect 1.8x2 smd: 1(-2.54,-2.1)
  rrect50% 1.8x2 smd: 2(0,-2.1) 3(2.54,-2.1) 4(2.54,2.1) 5(0,2.1) 6(-2.54,2.1)
  silkscreen extent -3.81,-3.3 3.56,2.61, body extent -3.5,-2.5 3.5,2.5, height 1.36
QFN3X4-19 [mm]
  oval 0.8x0.25 smd mask+0.05: 1(-1.5,1.5)
  rect 0.8x0.25 smd mask+0.05: 2(-1.5,1) 3(-1.5,0.5) 4(-1.5,0) 5(-1.5,-0.5) 6(-1.5,-1) 7(-1.5,-1.5) 10(1.5,-1.5) 11(1.5,-1) 12(1.5,-0.5) 13(1.5,0) 14(1.5,0.5) 15(1.5,1)
  oval 0.25x0.8 smd mask+0.05: 8(-0.75,-2) 16(1,2) 19(-0.75,2)
  rect 0.35x0.6 smd mask+0.05: 9(-0.275,-0.675)
  rect 0.25x2 smd mask+0.05: 9(-0.2,-1.375)
  rect 0.28x2.4 smd mask+0.05: 17(0.34,1.2)
  rect 0.35x1.1 smd mask+0.05: 18(-0.275,0.55)
  silkscreen extent -2.02,-2.02 1.51,2.11
SOP8W [mil]
  oval 70x27.56 smd: 1(0,0) 2(0,-50) 3(0,-100) 4(0,-150) 5(281.59,-150) 6(281.59,-100) 7(281.59,-50) 8(281.59,0)
  silkscreen extent 48,-178 228,26, body extent 19,-173 263,23, height 69
SOT23-6 [mm] "SOT-23/SC-74A; 5 Leads; Body 3.1 x 3 mm, inc. leads (LxW max)"
  rect 1x0.5 smd: 1(0,0) 2(0,-0.95) 3(0,-1.9) 4(2.4,-1.9) 5(2.4,-0.95) 6(2.4,0)
  silkscreen extent 0.76,-2.45 1.65,0.55, body extent -0.05,-2.41 2.29,0.51, height 1
SWPA8050S [mm] "轮廓8mm*8mm ，焊盘间距3.8mm"
  rect 2.2x3.81 smd: 1(-3,0) 2(3,0)
  silkscreen extent -4.32,-4.06 4.34,4.11, body extent -4,-4 4,4, height 5

## Part data
C1 C2 C3 C4 C5 C6 C7 C8 C9 C10 C11 C12 C13 C14 C15 C16 C17 C18 C19 C20 C21 C22 C23 C24 C25 C26 C27 C28 C29 C30 C31 C32 C33 C34 C35 C36 C37 C38 C39 C40 C41 C42 C43 C44 C45 C46 C47 C48 C49 C50 C51 C52 C53 C54 C55 C56 C57 C58 C59 C60 C61 C62 C63 C64 C65 C66 C67 C68 C69 C70 C71 C72 C73 C74 C75 C76 C77 C78 C79 C80 C81 C82 C83 C84 C85 C86 C87 C88 C89 C90 C91 C92 C93 C94 C95 C96 C97 C98 C99 C100 C101 C102 C103 C104 C105 C106 C107 C108 C109 C110 C111 C112 C113 C114 C115 C116 C117 C118 C119 C120 C121: library part CAP
J1 J2 J3: library part CON100
J4: library part CON14
J5: library part CON3
K1: library part KEY1
L1 L2 L3 L4 L5: library part INDUCTOR1
R1 R2 R3 R4 R5 R6 R7 R8 R9 R10 R11 R12 R13 R14 R15 R16 R17 R18 R19 R20 R21 R22 R23 R24 R25 R26 R27 R28 R29 R30 R31 R32 R33 R34 R35 R36 R37 R38 R39 R40 R41 R42 R43 R44 R45 R46 R47 R48 R49 R50 R51 R52 R53 R54 R55 R56 R57 R58: library part RES2
U1: library part "MT40A512M16LY-062E IT:E"
U2: library part XC7K325T-1FFG676C, "Kintex-7 FPGA, 500 User I/Os, 8 GTX, 676-Ball BGA, Speed Grade 1, Commerical Grade, Pb-Free"
U3: library part N25Q128A11EF840E
U4 U5 U7 U8: library part JW5060TTSOTB#PBF
U6: library part IC_JW85012
V1 V2 V3 V4: library part LED2
Y1 Y2 Y3: library part XTAL

## Free pads (board coordinates)
  round 150 hole 120: 0(118.11,236.22) 0(118.11,2322.83) 0(2244.09,629.92)
  round 39.37 smd mask+2: ""(367.8,806.6) ""(2134.2,336.8) ""(2429.6,2323.1)
  round 39.37 smd far side mask+2: ""(367.8,806.6) ""(2134.2,336.8) ""(2429.6,2323.1)

## Via types
v1: diameter 17.72, hole 11.81, Top Layer to Bottom Layer, tented both sides, 186 vias

## Nets (pads, with @x,y where several pads share a name; then routed paths per layer and width w, separated by ;. In a path a pad name is that pad's centre, name@x,y a point inside that pad or via, vN(x,y) a via of type N, cw(c..) or ccw(c..) an arc to the next point about the centre after c; other vN are vias at no path point)
64_L1_N: J1.40 U2.AE26
64_L1_P: J1.39 U2.AE25 | length 847.5
  Top Layer w10: v1@1136.91,1747.22 cw(c1136.91,1737.9) 1143.5,1744.49 cw(c1150.09,1751.08) v1@1140.77,1751.08 ; v1(1136.91,1751.08) U2.AE25@1156.6,1731.39 ; U2.AE25@1151.76,1731.39 ccw(c1140.07,1731.39) 1148.33,1739.66 ccw(c1156.6,1747.92) U2.AE25@1156.6,1736.23
  SIG1 w4: J1.39@1014.02,2503.5 1023.27,2494.25 cw(c986.27,2457.24) 1038.6,2457.24 1038.6,2448.29 ccw(c1076.2,2448.29) 1049.61,2421.7 cw(c876.12,2248.21) 1121.48,2248.21 1121.48,1788.34 ccw(c1174.18,1788.34) v1(1136.91,1751.08)
64_L2_N: J1.47 U2.AB26 | length 963.8
  Top Layer w10: v1@1097.54,1629.11 cw(c1097.54,1619.79) 1104.13,1626.38 cw(c1110.72,1632.97) v1@1101.4,1632.97 ; v1(1097.54,1632.97) U2.AB26@1117.23,1613.28 ; U2.AB26@1112.39,1613.28 ccw(c1100.69,1613.28) 1108.96,1621.55 ccw(c1117.23,1629.81) U2.AB26@1117.23,1618.12
  SIG2 w4: v1(1097.54,1632.97) ccw(c1060.28,1670.23) 1112.98,1670.23 1112.98,2263.49 cw(c1336.94,2263.49) 1178.43,2421.7 ccw(c1151.84,2448.29) 1189.44,2448.29 1189.44,2457.24 cw(c1241.77,2457.24) 1204.77,2494.25 J1.47@1214.02,2503.5
64_L2_P: J1.48 U2.AB25 | length 1001.8
  Top Layer w10: v1@1136.91,1629.11 cw(c1136.91,1619.79) 1143.5,1626.38 cw(c1150.09,1632.97) v1@1140.77,1632.97 ; v1(1136.91,1632.97) U2.AB25@1156.6,1613.28 ; U2.AB25@1151.76,1613.28 ccw(c1140.07,1613.28) 1148.33,1621.55 ccw(c1156.6,1629.81) U2.AB25@1156.6,1618.12
  SIG2 w4: v1(1136.91,1632.97) cw(c1174.18,1670.23) 1121.48,1670.23 1121.48,2265.98 cw(c1330.91,2265.98) 1182.82,2414.07 J1.48@1214.82,2446.08 ; 1188.5,2419.76 ccw(c1157.72,2450.55) J1.48@1201.26,2450.55 ; 1195.33,2426.59 ccw(c1171.37,2450.55) J1.48@1205.26,2450.55 ; 1201.23,2432.49 cw(c1214.02,2419.7) J1.48@1214.02,2437.78 ; 1202.16,2433.42 ccw(c1185.03,2450.55) J1.48@1209.26,2450.55
64_L3_N: J1.46 U2.AF25 | length 769.7
  Top Layer w6: J1.46@1155.7,2442.23 cw(c1120.5,2407.02) 1170.28,2407.02 ; U2.AF25@1156.6,1770.76 ccw(c1123.56,1803.8) 1170.28,1803.8 J1.46@1170.28,2453.6 ; J1.46@1159.94,2446.47 cw(c1134.98,2421.51) 1170.28,2421.51 ; J1.46@1164.19,2450.71 cw(c1149.47,2436) 1170.28,2436
64_L3_P: J1.45 U2.AF24 | length 746.6
  Top Layer w6: J1.45@1164.02,2503.5 1173.27,2494.25 cw(c1133.61,2454.59) 1189.7,2454.59 1189.7,2438.7 cw(c1176.99,2438.7) 1185.98,2429.71 ccw(c1194.97,2420.72) 1182.25,2420.72 ; 1182.28,2420.72 1182.28,1803.8 ccw(c1229.01,1803.8) U2.AF24@1195.97,1770.76
64_L4_N: J1.38 U2.AD26 | length 1081.5
  Top Layer w10: v1@1097.54,1707.85 cw(c1097.54,1698.53) 1104.13,1705.12 cw(c1110.72,1711.71) v1@1101.4,1711.71 ; v1(1097.54,1711.71) U2.AD26@1117.23,1692.02 ; U2.AD26@1112.39,1692.02 ccw(c1100.69,1692.02) 1108.96,1700.29 ccw(c1117.23,1708.55) U2.AD26@1117.23,1696.86
  SIG3 w4: J1.38@964.02,2437.78 cw(c964.02,2419.7) 976.81,2432.49 ; J1.38@964.02,2445.28 1115.49,2293.8 cw(c931.47,2109.78) 1191.72,2109.78 1191.72,1705.28 cw(c1182.67,1705.28) 1182.67,1696.23 1134.81,1696.23 cw(c1134.81,1748.93) v1@1097.54,1711.66 ; J1.38@968.78,2450.55 ccw(c993.01,2450.55) 975.88,2433.42 ; J1.38@972.78,2450.55 ccw(c1006.67,2450.55) 982.71,2426.59 ; J1.38@976.78,2450.55 ccw(c1020.32,2450.55) 989.54,2419.76
64_L4_P: J1.37 U2.AC26 | length 1058.6
  Top Layer w10: v1@1097.54,1668.48 cw(c1097.54,1659.16) 1104.13,1665.75 cw(c1110.72,1672.34) v1@1101.4,1672.34 ; v1(1097.54,1672.34) U2.AC26@1117.23,1652.65 ; U2.AC26@1112.39,1652.65 ccw(c1100.69,1652.65) 1108.96,1660.92 ccw(c1117.23,1669.18) U2.AC26@1117.23,1657.49
  SIG3 w4: J1.37@964.02,2503.5 973.27,2494.25 cw(c936.27,2457.24) 988.6,2457.24 988.6,2448.29 ccw(c1026.2,2448.29) 999.61,2421.7 1121.6,2299.71 cw(c931.81,2109.92) 1200.22,2109.92 1200.22,1704.61 cw(c1183.34,1704.61) 1183.34,1687.73 1134.81,1687.73 ccw(c1134.81,1635.03) v1@1097.54,1672.29
64_L5_N: J1.49 U2.AD25 | length 888
  Top Layer w10: v1@1136.91,1707.85 cw(c1136.91,1698.53) 1143.5,1705.12 cw(c1150.09,1711.71) v1@1140.77,1711.71 ; v1(1136.91,1711.71) U2.AD25@1156.6,1692.02 ; U2.AD25@1151.76,1692.02 ccw(c1140.07,1692.02) 1148.33,1700.29 ccw(c1156.6,1708.55) U2.AD25@1156.6,1696.86
  SIG2 w4: v1(1136.91,1711.71) ccw(c1099.65,1748.97) 1152.35,1748.97 1152.35,2238.03 cw(c1412.1,2238.03) 1228.43,2421.7 ccw(c1201.84,2448.29) 1239.44,2448.29 1239.44,2457.24 cw(c1291.77,2457.24) 1254.77,2494.25 J1.49@1264.02,2503.5
64_L5_P: J1.50 U2.AD24 | length 925.7
  Top Layer w10: v1@1176.28,1707.85 cw(c1176.28,1698.53) 1182.87,1705.12 cw(c1189.46,1711.71) v1@1180.14,1711.71 ; v1(1176.28,1711.71) U2.AD24@1195.97,1692.02 ; U2.AD24@1191.13,1692.02 ccw(c1179.44,1692.02) 1187.7,1700.29 ccw(c1195.97,1708.55) U2.AD24@1195.97,1696.86
  SIG2 w4: v1(1176.28,1711.71) cw(c1213.55,1748.97) 1160.85,1748.97 1160.85,2238.79 cw(c1410.28,2238.79) 1233.9,2415.16 J1.50@1264.82,2446.08 ; 1238.5,2419.76 ccw(c1207.72,2450.55) J1.50@1251.26,2450.55 ; 1245.33,2426.59 ccw(c1221.37,2450.55) J1.50@1255.26,2450.55 ; 1251.23,2432.49 cw(c1264.02,2419.7) J1.50@1264.02,2437.78 ; 1252.16,2433.42 ccw(c1235.03,2450.55) J1.50@1259.26,2450.55
64_L6_N: J1.35 U2.AC24 | length 1129.8
  Top Layer w10: v1@1176.28,1668.48 cw(c1176.28,1659.16) 1182.87,1665.75 cw(c1189.46,1672.34) v1@1180.14,1672.34 ; v1(1176.28,1672.34) U2.AC24@1195.97,1652.65 ; U2.AC24@1191.13,1652.65 ccw(c1179.44,1652.65) 1187.7,1660.92 ccw(c1195.97,1669.18) U2.AC24@1195.97,1657.49
  SIG3 w4: J1.35@914.02,2503.5 923.27,2494.25 cw(c886.27,2457.24) 938.6,2457.24 938.6,2448.29 ccw(c976.2,2448.29) 949.61,2421.7 1097.92,2273.39 cw(c911.15,2086.63) 1175.28,2086.63 1175.28,1935.53 cw(c988.01,1935.53) 1120.43,1803.11 1093.86,1776.54 ccw(c1133.88,1736.52) 1077.28,1736.52 1077.28,1665.95 ccw(c1086.33,1665.95) 1086.33,1656.9 1139.02,1656.9 ccw(c1139.02,1709.6) v1(1176.28,1672.34)
64_L6_P: J1.36 U2.AB24 | length 1184.5
  Top Layer w10: v1@1176.28,1629.11 cw(c1176.28,1619.79) 1182.87,1626.38 cw(c1189.46,1632.97) v1@1180.14,1632.97 ; v1(1176.28,1632.97) U2.AB24@1195.97,1613.28 ; U2.AB24@1191.13,1613.28 ccw(c1179.44,1613.28) 1187.7,1621.55 ccw(c1195.97,1629.81) U2.AB24@1195.97,1618.12
  SIG3 w4: J1.36@910.5,2448.8 1092.25,2267.04 cw(c911.11,2085.9) 1167.28,2085.9 1167.28,1936.79 cw(c984.98,1936.79) 1113.89,1807.88 1087.68,1781.68 ccw(c1132.11,1737.25) 1069.28,1737.25 1069.28,1665.28 ccw(c1086.16,1665.28) 1086.16,1648.4 1139.02,1648.4 cw(c1139.02,1595.7) v1(1176.28,1632.97) ; J1.36@914.02,2437.78 cw(c914.02,2419.7) 926.81,2432.49 ; J1.36@918.78,2450.55 ccw(c943.01,2450.55) 925.88,2433.42 ; J1.36@922.78,2450.55 ccw(c956.67,2450.55) 932.71,2426.59 ; J1.36@926.78,2450.55 ccw(c970.32,2450.55) 939.54,2419.76
64_L7_N: J1.56 U2.AF22 | length 845.4
  Top Layer w6: U2.AF22@1268.1,1769.37 1268.1,2152.18 cw(c1620.31,2152.18) 1371.26,2401.23 J1.56@1419.31,2449.29 ; 1268.1,1788.75 ccw(c1292.7,1788.75) U2.AF22@1275.3,1771.36 ; 1268.1,1803.24 ccw(c1307.19,1803.24) U2.AF22@1279.55,1775.6 ; 1389.3,2419.28 ccw(c1358.03,2450.55) J1.56@1402.26,2450.55 ; 1399.55,2429.52 ccw(c1378.52,2450.55) J1.56@1408.26,2450.55 ; 1405.12,2435.1 cw(c1414.02,2426.2) J1.56@1414.02,2438.78
64_L7_P: J1.55 U2.AE22 | length 822.9
  Top Layer w6: U2.AE22@1274.71,1731.39 cw(c1319.64,1776.32) 1256.1,1776.32 1256.1,2152.15 cw(c1620.22,2152.15) 1362.75,2409.62 1378.33,2425.2 ccw(c1351.74,2451.79) 1389.34,2451.79 1389.34,2457 cw(c1442.01,2457) 1404.77,2494.25 J1.55@1414.02,2503.5
64_L9_N: J1.53 U2.AC23 | length 933.8
  Top Layer w10: v1@1215.65,1668.48 cw(c1215.65,1659.16) 1222.24,1665.75 cw(c1228.83,1672.34) v1@1219.51,1672.34 ; v1(1215.65,1672.34) U2.AC23@1235.34,1652.65 ; U2.AC23@1230.5,1652.65 ccw(c1218.81,1652.65) 1227.07,1660.92 ccw(c1235.34,1669.18) U2.AC23@1235.34,1657.49
  SIG2 w4: v1(1215.65,1672.34) ccw(c1178.39,1709.6) 1231.09,1709.6 1231.09,2193.91 cw(c1546.04,2193.91) 1323.34,2416.61 1328.43,2421.7 ccw(c1301.84,2448.29) 1339.44,2448.29 1339.44,2457.24 cw(c1391.77,2457.24) 1354.77,2494.25 J1.53@1364.02,2503.5
64_L9_P: J1.54 U2.AC22 | length 971.6
  Top Layer w10: v1@1255.02,1668.48 cw(c1255.02,1659.16) 1261.61,1665.75 cw(c1268.2,1672.34) v1@1258.88,1672.34 ; v1(1255.02,1672.34) U2.AC22@1274.71,1652.65 ; U2.AC22@1269.87,1652.65 ccw(c1258.18,1652.65) 1266.44,1660.92 ccw(c1274.71,1669.18) U2.AC22@1274.71,1657.49
  SIG2 w4: v1(1255.02,1672.34) cw(c1292.29,1709.6) 1239.59,1709.6 1239.59,2195.3 cw(c1542.67,2195.3) 1328.36,2409.61 J1.54@1364.82,2446.08 ; 1338.5,2419.76 ccw(c1307.72,2450.55) J1.54@1351.26,2450.55 ; 1345.33,2426.59 ccw(c1321.37,2450.55) J1.54@1355.26,2450.55 ; 1351.23,2432.49 cw(c1364.02,2419.7) J1.54@1364.02,2437.78 ; 1352.16,2433.42 ccw(c1335.03,2450.55) J1.54@1359.26,2450.55
64_L11_N: J1.58 U2.AE21 | length 982.3
  Top Layer w10: v1@1294.39,1747.22 cw(c1294.39,1737.9) 1300.98,1744.49 cw(c1307.57,1751.08) v1@1298.25,1751.08 ; v1(1294.39,1751.08) U2.AE21@1314.08,1731.39 ; U2.AE21@1309.24,1731.39 ccw(c1297.55,1731.39) 1305.81,1739.66 ccw(c1314.08,1747.92) U2.AE21@1314.08,1736.23
  SIG3 w4: v1(1294.39,1751.08) 1286.21,1742.9 cw(c1268.69,1760.41) 1268.69,1735.64 1260.83,1735.64 cw(c1260.83,1744.69) 1251.78,1744.69 1251.78,2097.02 cw(c1580.16,2097.02) 1347.96,2329.22 J1.58@1464.02,2445.28 ; 1438.5,2419.76 ccw(c1407.72,2450.55) J1.58@1451.26,2450.55 ; 1445.33,2426.59 ccw(c1421.37,2450.55) J1.58@1455.26,2450.55 ; 1451.23,2432.49 cw(c1464.02,2419.7) J1.58@1464.02,2437.78 ; 1452.16,2433.42 ccw(c1435.03,2450.55) J1.58@1459.26,2450.55